# Altium PCB Battery_PSU.PcbDoc
Units mm, origin at the board's own origin, x right, y up, seen from the top; angles counter-clockwise.
Board outline 96.5 x 58 mm, 4 copper layers (Top Layer, Layer 1, Layer 2, Bottom Layer), stack 0.58 mm thick; 159 components, 93 nets, 531 pads, 10 vias.
Unrouted connection lines stored in the file: 406.
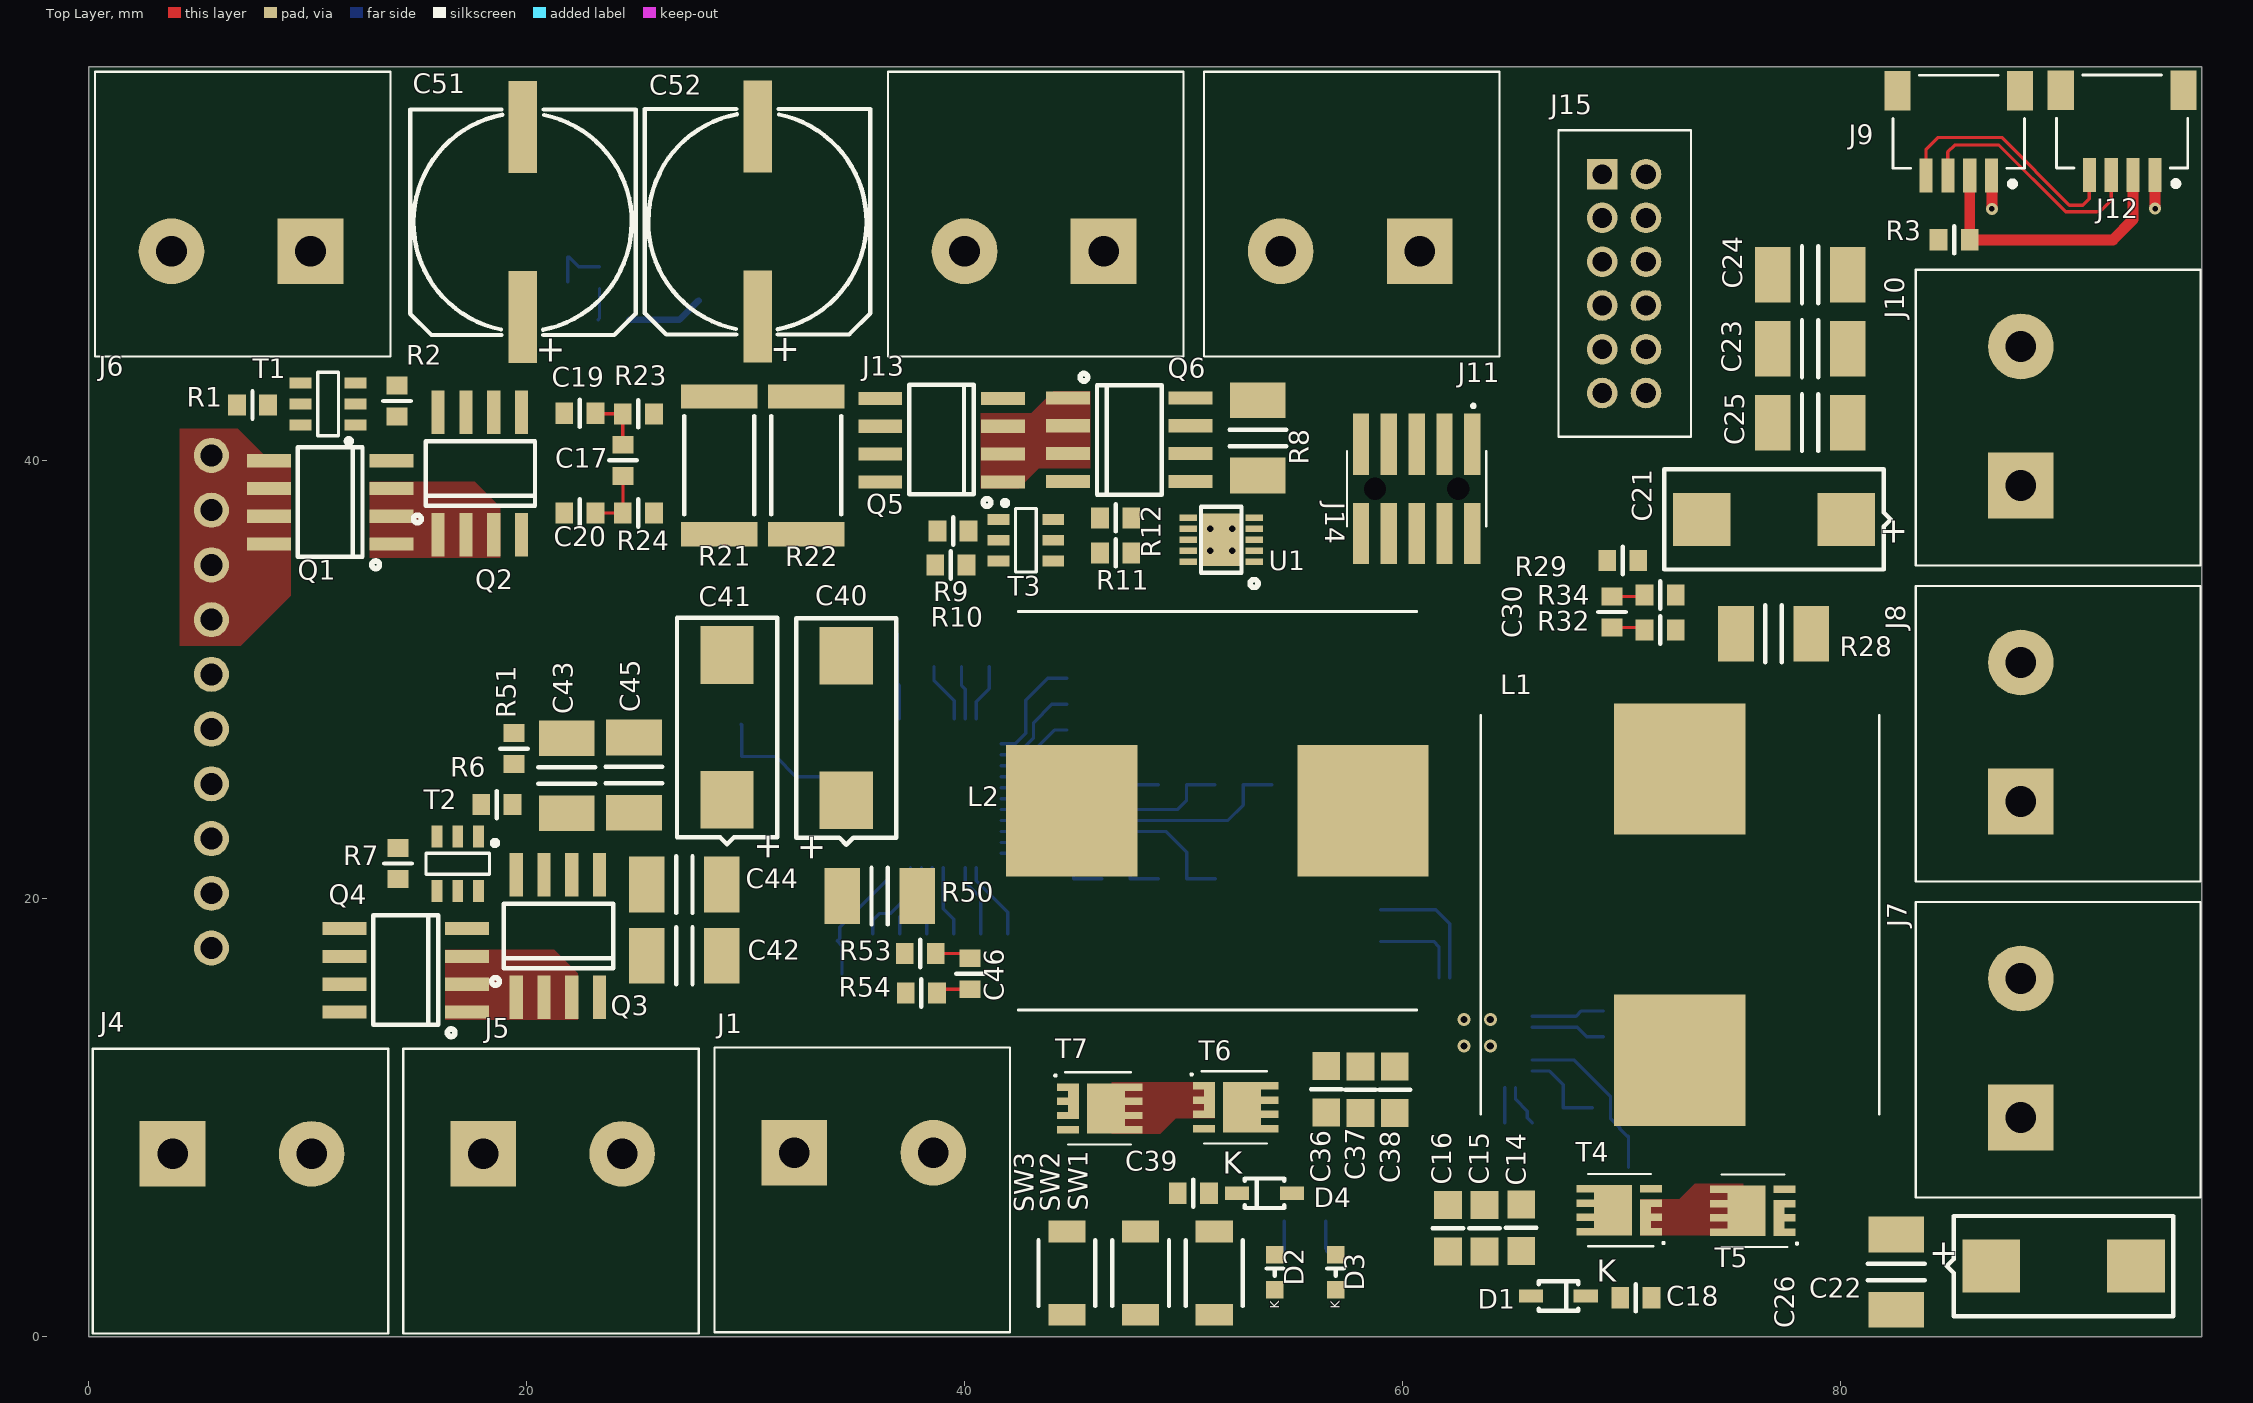
[diagram p0: Top Layer view]
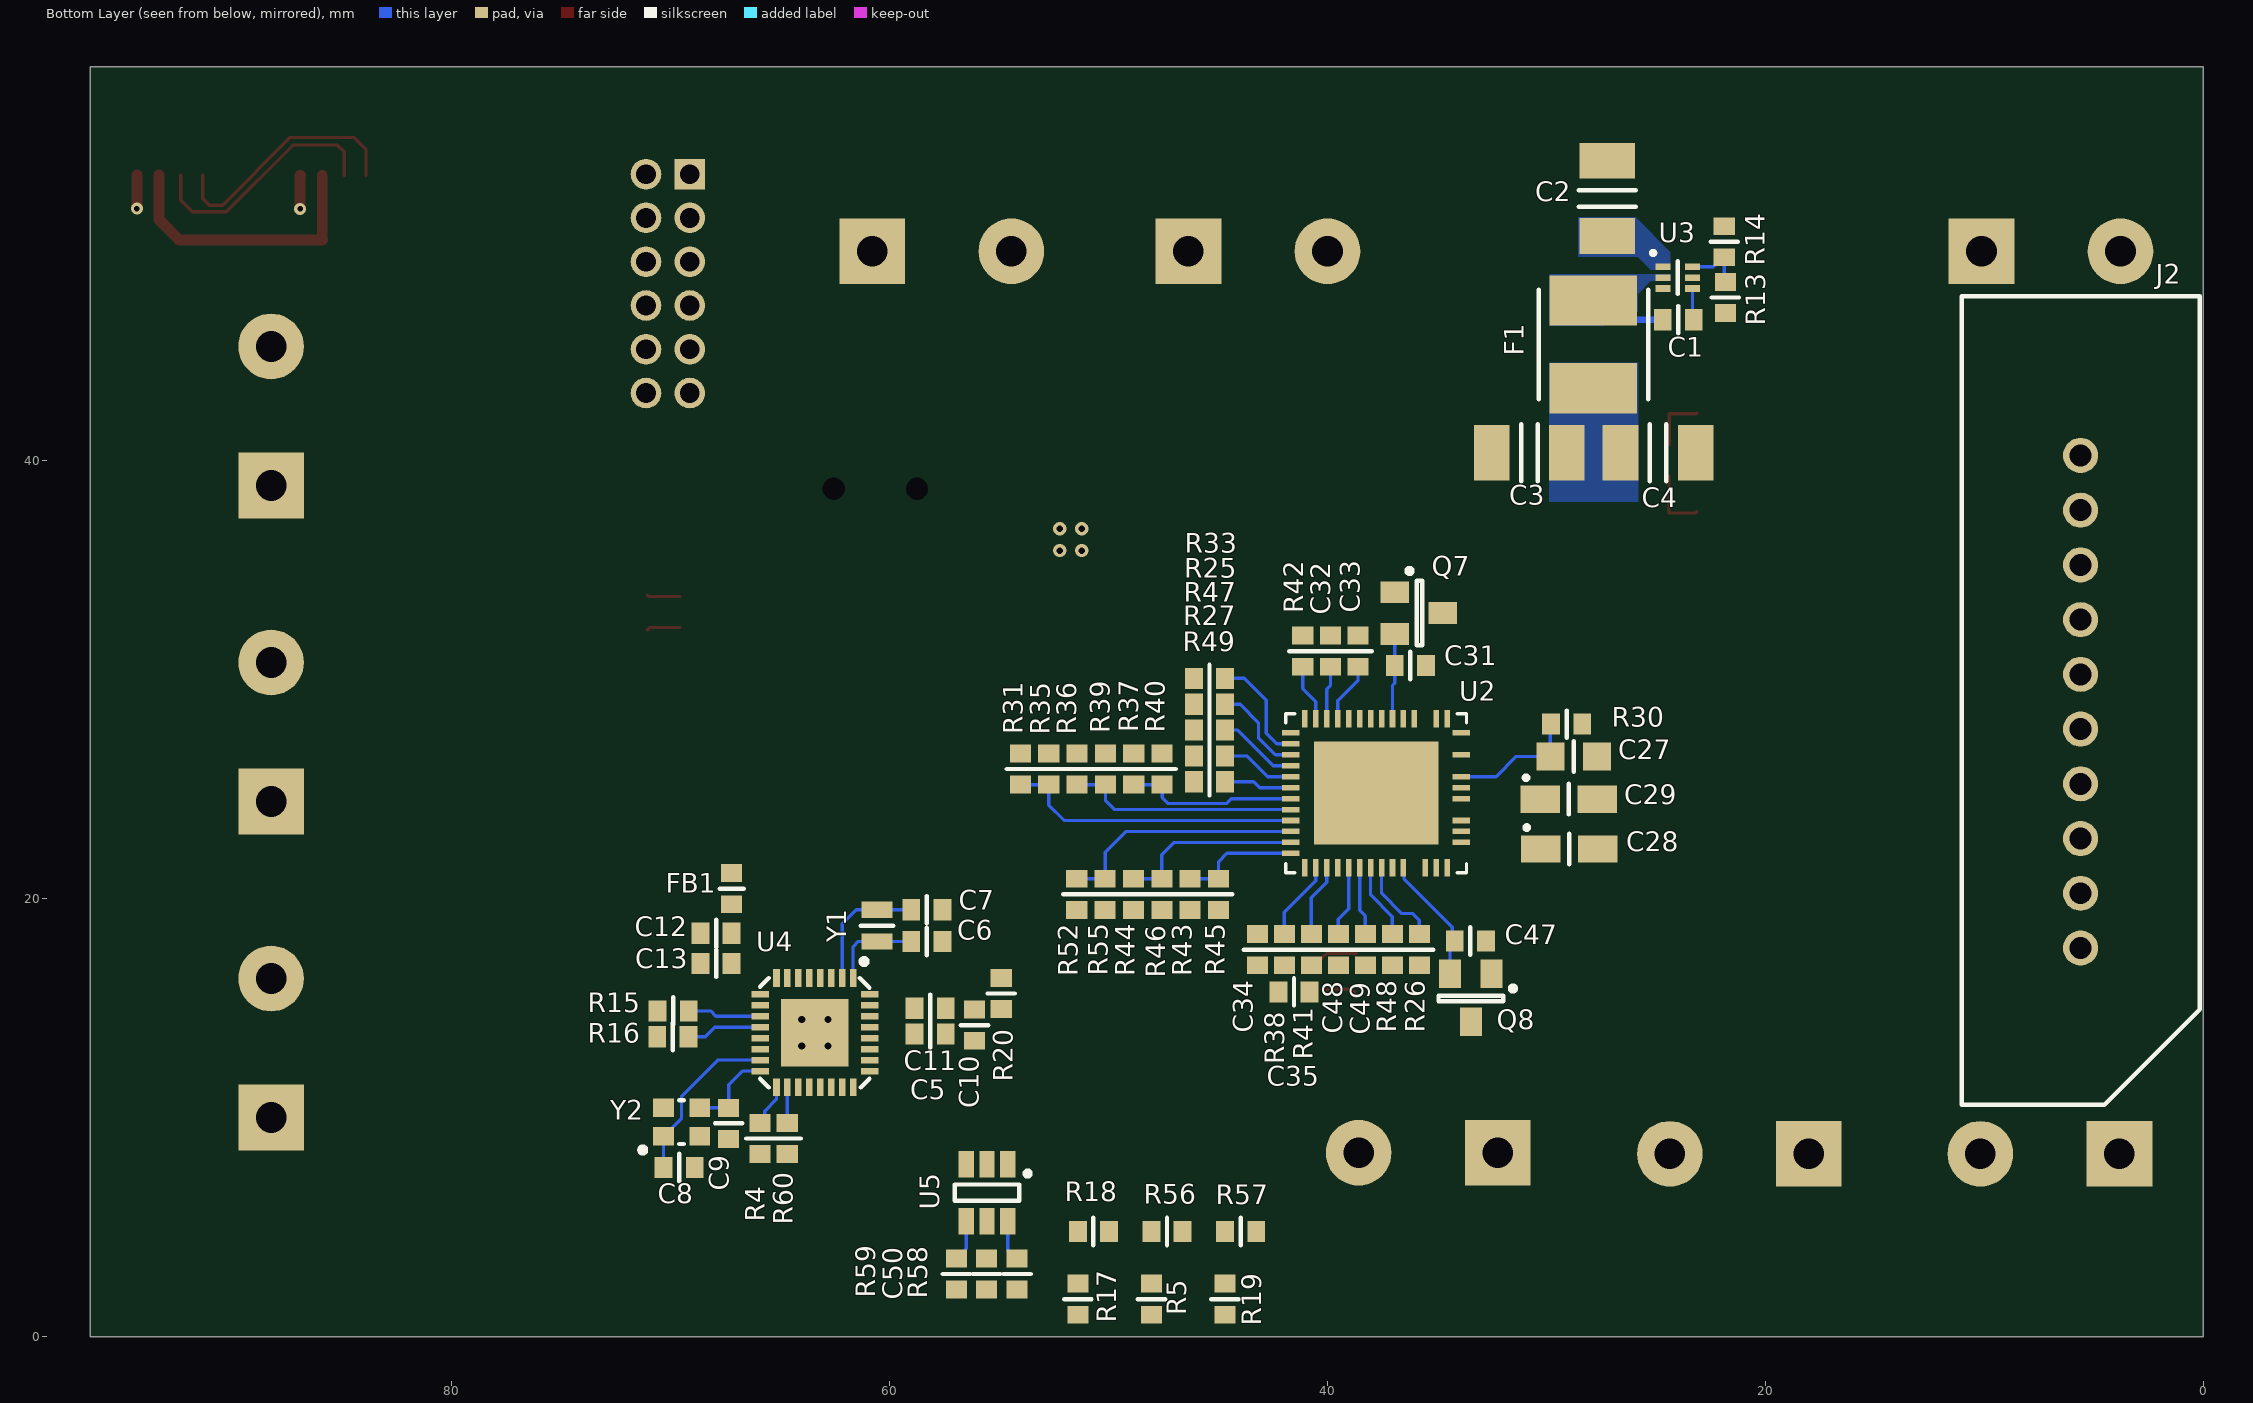
[diagram p1: Bottom Layer view, seen from below]
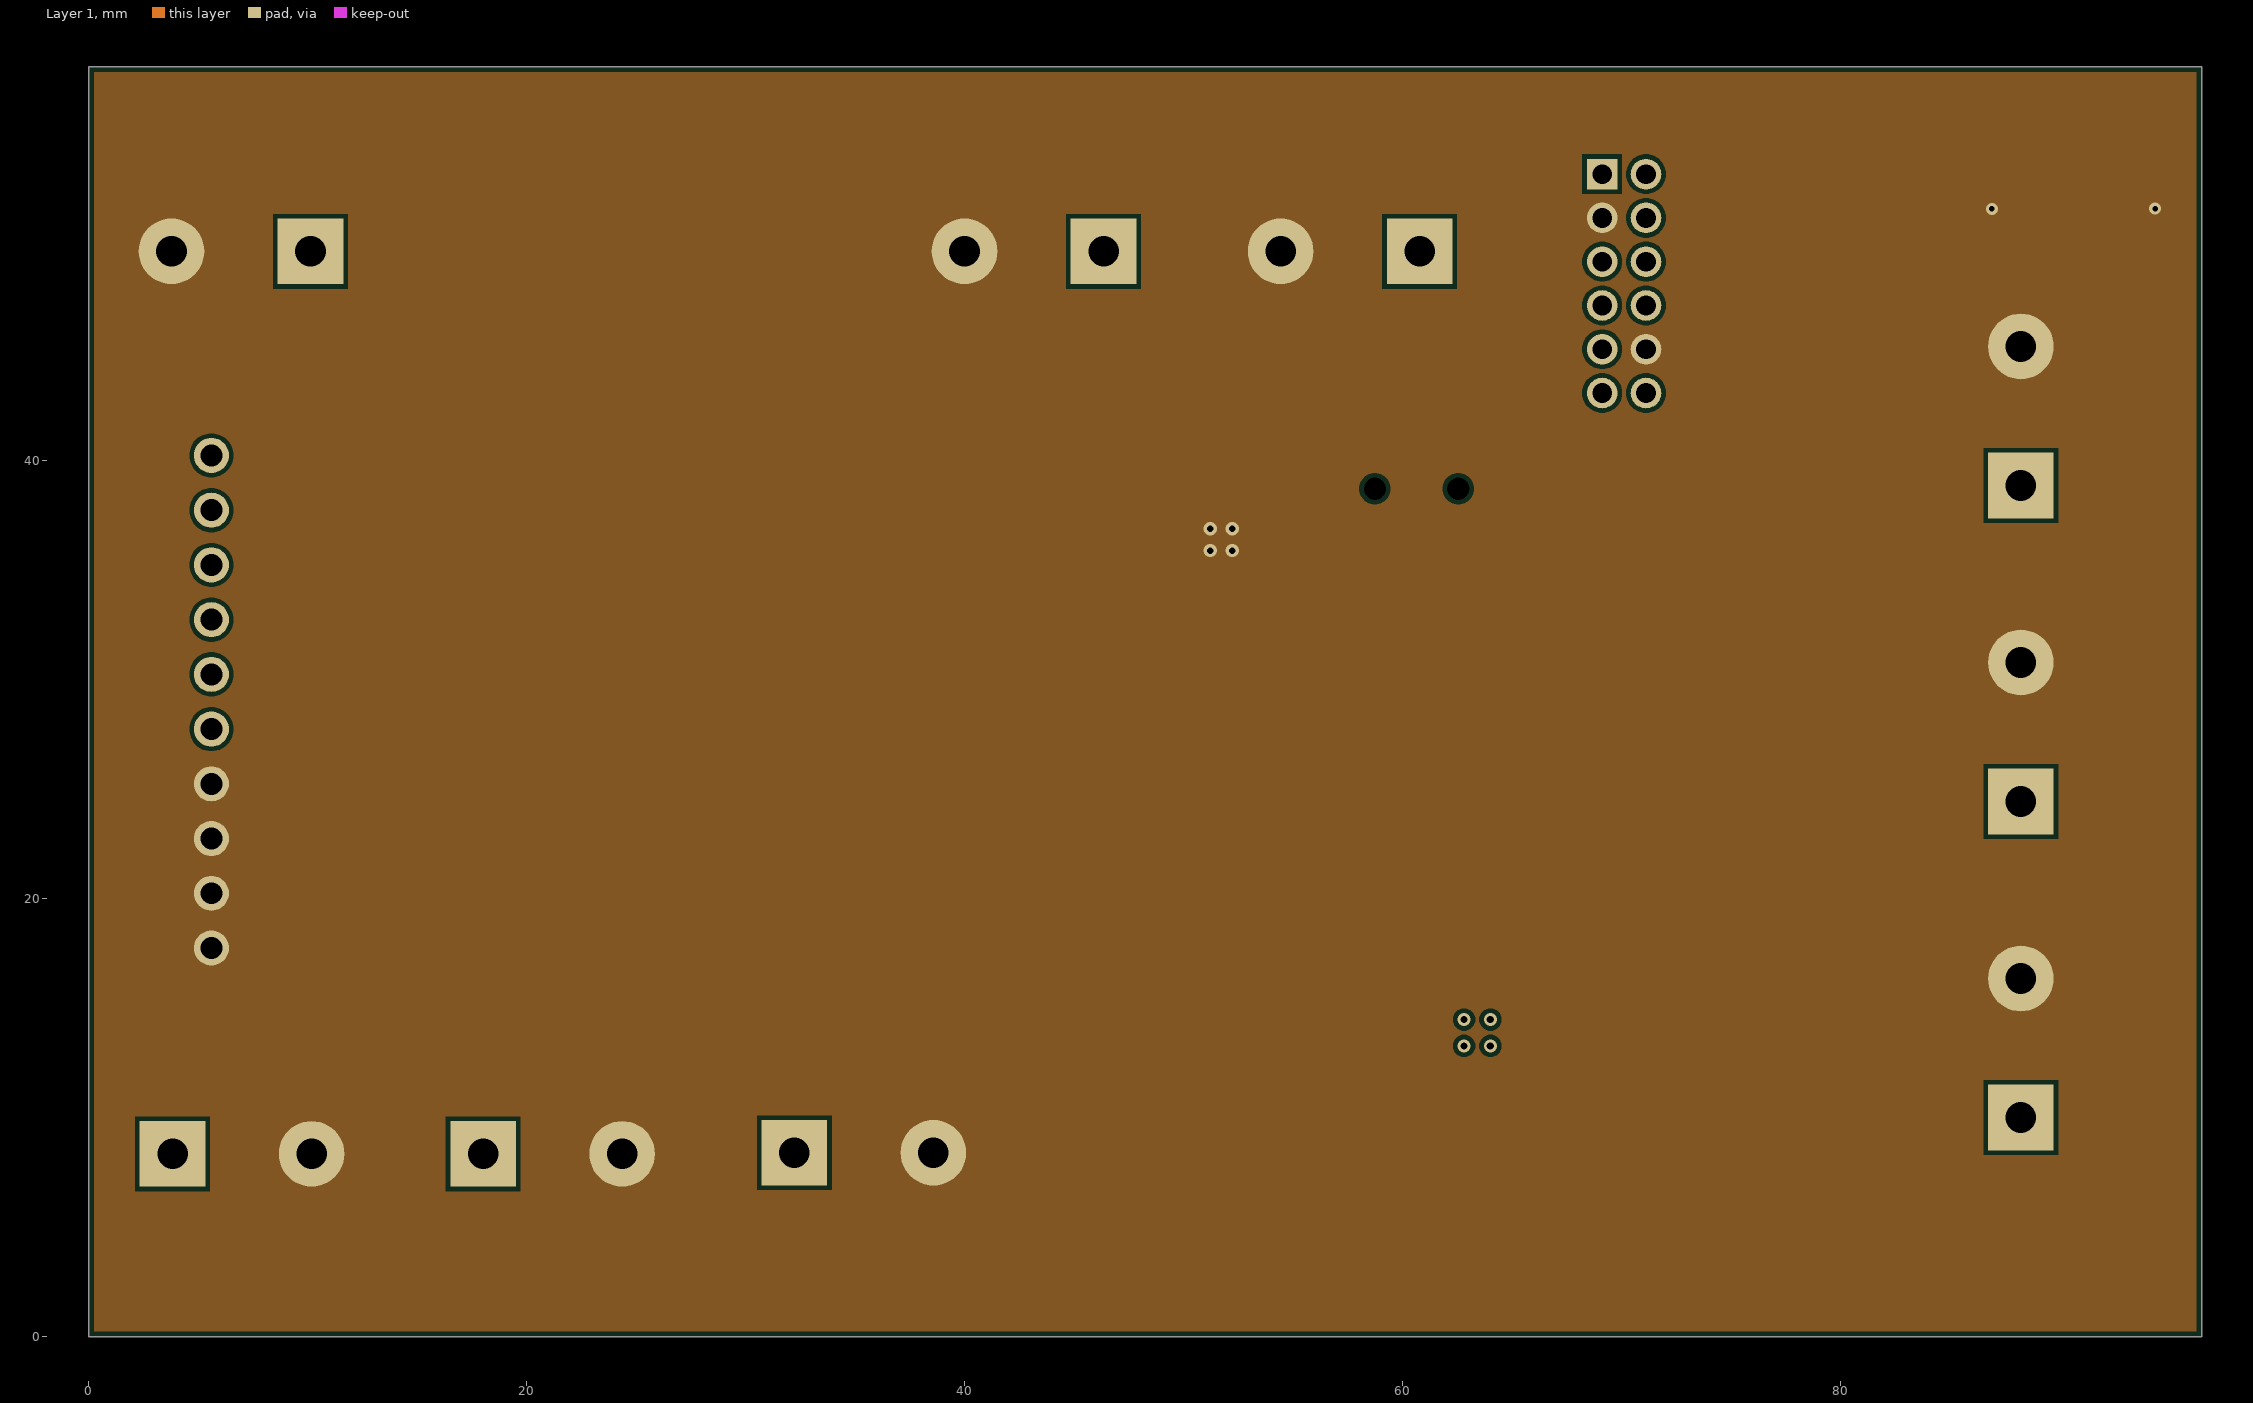
[diagram p2: Layer 1]

## Layer stack, top to bottom
Top Solder: solder mask 0.0254, SM-001, Dk 4
Top Layer: signal copper 0.035
Dielectric 6: prepreg 0.12, PR2116, Dk 4.13
Layer 1: signal copper 0.035
Dielectric 1: core 0.2, FR4, Dk 4.35
Layer 2: signal copper 0.035
Dielectric 7: prepreg 0.12, PR2116, Dk 4.13
Bottom Layer: signal copper 0.035
Bottom Solder: solder mask 0.0254, SM-001, Dk 4

## Board outline
0,0 96.5,0 96.5,58 0,58

## Design rules (kind name [scope] priority, off if disabled: settings)
Clearance Clearance_PWR [InNetClass('POWER_CLASS')] p1: gap=0.2 ignorepadtopadclearanceinfootprint=TRUE except(0: Arc-Hole Track-Hole SMDPad-Hole THPad-Hole Via-Hole Fill-Hole Poly-Hole Region-Hole Text-Hole) // Power clearance
Clearance Clearance_Global [All] p2: gap=0.125 ignorepadtopadclearanceinfootprint=TRUE except(0: Arc-Hole Track-Hole SMDPad-Hole THPad-Hole Via-Hole Fill-Hole Poly-Hole Region-Hole Text-Hole) // Global clearance if previous conditions aren't met
DiffPairsRouting DiffPairsRouting_Global [All] p1: maxlimit=0.5 minlimit=0.5 mostfreqgap=0.5 toplayer_minwidth=0.5 toplayer_maxwidth=0.5 toplayer_prefwidth=0.5 midlayer3_minwidth=0.5 midlayer3_maxwidth=0.5 midlayer3_prefwidth=0.5 midlayer4_minwidth=0.5 midlayer4_maxwidth=0.5 midlayer4_prefwidth=0.5 bottomlayer_minwidth=0.5 bottomlayer_maxwidth=0.5 bottomlayer_prefwidth=0.5 maxuncoupledlength=12.7
HoleSize [All] p1: absolutevalues=TRUE maxlimit=4.5 minlimit=0.15 maxpercent=80.000 minpercent=20.000
HoleToHoleClearance [All] p1: gap=0.475 allowstackedmicrovias=TRUE
MaximumViaCount MaximumViaCount_ETH [InDifferentialPairClass('ETH_DIFF_CLASS')] p1: limit=2
MaximumViaCount MaximumViaCount_PCIe [InDifferentialPairClass('PCIE_DIFF_CLASS')] p2: limit=2
MinimumAnnularRing [All] p1: minimumring=0.124
MinimumSolderMaskSliver [All] p1: minsoldermaskwidth=0.1
PolygonConnect [All] p1: connectstyle=Direct reliefconductorwidth=0.254 reliefentries=4 polygonreliefangle="90 Angle" airgapwidth=0.254
RoutingVias "RoutingVias <= 0.45mm" [(ObjectKind = 'Via') and (HoleDiameter <= AsMM(0.45))] p1: holewidth=0.25 width=0.5 viastyle="Through Hole" minholewidth=0.15 minwidth=0.5 maxholewidth=0.45 maxwidth=0.8
RoutingVias "RoutingVias > 0.45mm" [(ObjectKind = 'Via') and (HoleDiameter > AsMM(0.45))] p2: holewidth=0.5 width=0.85 viastyle="Through Hole" minholewidth=0.5 minwidth=0.85 maxholewidth=0.9 maxwidth=1.25
SilkToSilkClearance [All] p1: silktosilkclearance=0.1
SilkToSolderMaskClearance [IsPad] p1: minsilkscreentomaskgap=0.1 clearancetoexposedcopper=TRUE
SolderMaskExpansion [All] p1: expansion=0.05 istentingtop=FALSE
UnRoutedNet [All] p1: checkbadconnections=TRUE
Width Width_Power [InNetClass('POWER_CLASS')] p1: maxlimit=3 minlimit=0.3 preferedwidth=0.3 // Width for power signals
Width Width_Global [All] p2: maxlimit=0.3 minlimit=0.125 preferedwidth=0.15 // Global Width if the previous conditions aren't met
23 further rules are at their usual default settings.

## Classes and differential pairs
net class POWER_CLASS: +3V3_ANA_UC +3V3_UC +5V +5V_P +12V +VBAT +VP GND NetC1_2 NetC14_1 NetJ9_2 NetJ11_1 NetL1_1 NetL1_2 NetL2_1 NetL2_2 NetQ1_1 NetQ3_1 NetQ5_1 NetQ6_5
component class "PSU Unit": C14 C15 C16 C17 C18 C19 C20 C21 C22 C23 C24 C25 C26 C27 C28 C29 C30 C31 C32 C33 C34 C35 C36 C37 C38 C39 C40 C41 C42 C43 C44 C45 C46 C47 C48 C49 C51 C52 D1 D4 J15 L1 L2 Q7 Q8 R21 R22 R23 R24 R25 R26 R27 R28 R29 R30 R31 R32 R33 R34 R35 R36 R37 R38 R39 R40 R41 R42 R43 R44 R45 R46 R47 R48 R49 R50 R51 R52 R53 R54 R55 T4 T5 T6 T7 U2
component class "PSU Manager": C1 C2 C3 C4 C5 C6 C7 C8 C9 C10 C11 C12 C13 C50 D2 D3 F1 FB1 J14 R4 R5 R13 R14 R15 R16 R17 R18 R19 R20 R56 R57 R58 R59 R60 SW1 SW2 SW3 U3 U4 U5 Y1 Y2
component class power: J1 J2 J4 J5 J6 J7 J8 J9 J10 J11 J12 J13 Q1 Q2 Q3 Q4 Q5 Q6 R1 R2 R3 R6 R7 R8 R9 R10 R11 R12 T1 T2 T3 U1

## Components (designator, comment, footprint, x,y, rotation, side; value= is the part's Value field where it differs from the comment)
C1 "100nF" SM/C_0603 23.975,46.45 r0 bottom
C2 "22uF" SM/C_1210 27.225,51.989 r90 bottom
C3 "22uF" SM/C_1210 30.775,40.375 r0 bottom
C4 "22uF" SM/C_1210 24.9,40.375 r180 bottom
C5 "1uF" SM/C_0603 58.15,13.825 r180 bottom
C6 "15pF" SM/C_0603 58.3,18.05 r180 bottom
C7 "15pF" SM/C_0603 58.3,19.5 r180 bottom
C8 "15pF" SM/C_0603 69.614,7.725 r180 bottom
C9 "15pF" SM/C_0603 67.35,9.739 r270 bottom
C10 "1uF" SM/C_0603 56.125,14.225 r270 bottom
C11 "100nF" SM/C_0603 58.15,15 r180 bottom
C12 "1uF" SM/C_0603 67.925,18.425 r0 bottom
C13 "100nF" SM/C_0603 67.925,17.05 r0 bottom
C14 "2.2uF" SM/C_0805 65.425,4.975 r270 top
C15 "2.2uF" SM/C_0805 63.75,4.95 r270 top
C16 "2.2uF" SM/C_0805 62.075,4.95 r270 top
C17 "1nF" SM/C_0603 24.4,40.025 r270 top
C18 "100nF" SM/C_0603 70.661,1.775 r0 top
C19 "1nF" SM/C_0603 22.425,42.175 r180 top
C20 "1nF" SM/C_0603 22.425,37.625 r180 top
C21 "150uF" SM/CT_7343_12_D 76.973,37.325 r180 top
C22 "150uF" SM/CT_7343_12_D 90.2,3.225 r0 top
C23 "22uF" SM/C_1210 78.625,45.125 r180 top
C24 "22uF" SM/C_1210 78.625,48.5 r180 top
C25 "22uF" SM/C_1210 78.625,41.75 r180 top
C26 "22uF" SM/C_1210 82.55,2.95 r270 top
C27 "1uF" SM/C_0805 28.75,26.5 r180 bottom
C28 "4.7uF" T_CAPMP3216X180N 28.95,22.275 r180 bottom
C29 "4.7uF" T_CAPMP3216X180N 28.975,24.55 r180 bottom
C30 "1nF" SM/C_0603 69.575,33.1 r90 top
C31 "10nF" SM/C_0603 36.214,30.65 r180 bottom
C32 "100pF" SM/C_0603 39.863,31.311 r90 bottom
C33 "4.7nF" SM/C_0603 38.6,31.311 r90 bottom
C34 "1uF" SM/C_0603 43.2,17.675 r270 bottom
C35 "1uF" SM/C_0603 41.525,15.75 r0 bottom
C36 "2.2uF" SM/C_0805 56.525,11.3 r90 top
C37 "2.2uF" SM/C_0805 58.087,11.275 r90 top
C38 "2.2uF" SM/C_0805 59.65,11.275 r90 top
C39 "100nF" SM/C_0603 50.45,6.55 r180 top
C40 "150uF" SM/CT_7343_12_D 34.6,27.8 r90 top
C41 "150uF" SM/CT_7343_12_D 29.15,27.827 r90 top
C42 "22uF" SM/C_1210 27.2,17.4 r180 top
C43 "22uF" SM/C_1210 21.825,25.625 r90 top
C44 "22uF" SM/C_1210 27.2,20.65 r180 top
C45 "22uF" SM/C_1210 24.9,25.65 r90 top
C46 "1nF" SM/C_0603 40.25,16.575 r270 top
C47 "10nF" SM/C_0603 33.475,18.075 r180 bottom
C48 "100pF" SM/C_0603 39.5,17.675 r270 bottom
C49 "4.7nF" SM/C_0603 38.267,17.675 r270 bottom
C50 "100nF" SM/C_0603 55.575,2.861 r270 bottom
C51 "56uF" "SM/C SIZE F12" 19.825,50.9 r180 top
C52 "56uF" "SM/C SIZE F12" 30.55,50.925 r180 top
D1 "B140WS-7" "SM/D_SOD323_A1C2 (SC-76)" 67.125,1.85 r0 top
D2 "Green" "WL-SMCW_0603 - Green" 54.175,2.95 r90 top
D3 "Green" "WL-SMCW_0603 - Green" 56.95,2.95 r90 top
D4 "B140WS-7" "SM/D_SOD323_A1C2 (SC-76)" 53.7,6.55 r180 top
F1 "2.2uH" "TDK_SELF-SERIE VLS5045" 27.85,45.325 r270 bottom
FB1 "220 Ohm @ 100MHz" SM/L_0603 67.214,20.461 r270 bottom
J1 "HEADER_2" "PHOENIX MKDS 5/2-6,35 - 1714955" 38.575,8.4 r0 top
J2 "CONN DJI 10POS" "DJI Battery Connector" 5.6,29.05 r90 bottom locked
J4 "HEADER_2" "PHOENIX MKDS 5/2-6,35 - 1714955" 10.175,8.35 r0 top
J5 "HEADER_2" "PHOENIX MKDS 5/2-6,35 - 1714955" 24.361,8.35 r0 top
J6 "CONN 2 MALE" "PHOENIX MKDS 5/2-6,35 - 1714955" 3.775,49.575 r180 top
J7 "HEADER_2" "PHOENIX MKDS 5/2-6,35 - 1714955" 88.25,16.357 r90 top
J8 "HEADER_2" "PHOENIX MKDS 5/2-6,35 - 1714955" 88.25,30.793 r90 top
J9 "QWIIC I2C" JST_SM04B-SRSS-TB(LF)(SN) 85.414,53.042 r180 top
J10 "HEADER_2" "PHOENIX MKDS 5/2-6,35 - 1714955" 88.25,45.229 r90 top
J11 "HEADER_2" "PHOENIX MKDS 5/2-6,35 - 1714955" 54.436,49.575 r180 top
J12 "QWIIC I2C" JST_SM04B-SRSS-TB(LF)(SN) 92.875,53.05 r180 top
J13 "HEADER_2" "PHOENIX MKDS 5/2-6,35 - 1714955" 40,49.575 r180 top
J14 "FTSH-105-01-L-DV-K-A-P" FTSH-105-XX-YYY-DV-K-A-P-TR 60.65,38.725 r180 top
J15 "98414-G06-12ULF" 98414G0612ULF 69.125,53.1 r270 top
L1 "6.8uH" WE-HCI_189023 72.675,19.275 r90 top
L2 "6.8uH" WE-HCI_189023 51.55,24.025 r180 top
Q1 "SI4435FDY" "SOIC-8 - N" 11.025,38.105 r90 top
Q2 "SI4435FDY" "SOIC-8 - N" 17.86,39.425 r0 top
Q3 "SI4435FDY" "SOIC-8 - N" 21.425,18.3 r0 top
Q4 "SI4435FDY" "SOIC-8 - N" 14.475,16.73 r90 top
Q5 "SI4435FDY" "SOIC-8 - N" 38.95,40.95 r90 top
Q6 "SI4435FDY" "SOIC-8 - N" 47.525,40.97 r270 top
Q7 "MMBT3906" SOT23 35.825,33.05 r270 bottom
Q8 "MMBT3906" SOT23 33.45,15.475 r0 bottom
R1 "10K" SM/R_0603 7.475,42.55 r0 top
R2 "10K" SM/R_0603 14.075,42.739 r90 top
R3 "DNP" SM/R_0603 85.2,50.1 r0 top
R4 "4K7" SM/R_0603 65.925,9.05 r90 bottom
R5 "10K" SM/R_0603 48.037,1.711 r90 bottom
R6 "10K" SM/R_0603 18.636,24.3 r180 top
R7 "10K" SM/R_0603 14.125,21.614 r90 top
R8 "3mR" SM/R_1210 53.4,41.05 r90 top
R9 "10K" SM/R_0603 39.475,36.8 r0 top
R10 "10K" SM/R_0603 39.375,35.25 r0 top
R11 "10K" SM/R_0603 46.9,35.8 r0 top
R12 "DNP" SM/R_0603 46.9,37.4 r180 top
R13 "31K6" SM/R_0603 21.825,47.464 r90 bottom
R14 "10K" SM/R_0603 21.875,50.011 r90 bottom
R15 "4K7" SM/R_0603 69.884,14.878 r180 bottom
R16 "4K7" SM/R_0603 69.9,13.7 r180 bottom
R17 "10K" SM/R_0603 51.4,1.711 r90 bottom
R18 "22R" SM/R_0603 50.689,4.8 r180 bottom
R19 "10K" SM/R_0603 44.675,1.711 r90 bottom
R20 "1K" SM/R_0603 54.9,15.675 r90 bottom
R21 "6mR" SM/R_2512 28.8,39.8 r270 top
R22 "6mR" SM/R_2512 32.775,39.8 r270 top
R23 "1K" SM/R_0603 25.1,42.15 r180 top
R24 "1K" SM/R_0603 25.1,37.625 r180 top
R25 "10K" SM/R_0603 45.386,28.887 r180 bottom
R26 "10K" SM/R_0603 35.8,17.675 r90 bottom
R27 "10K" SM/R_0603 45.386,26.525 r0 bottom
R28 "3mR" SM/R_1210 76.95,32.1 r0 top
R29 "0R" SM/R_0603 70.064,35.45 r0 top
R30 "2R" SM/R_0603 29.075,27.975 r0 bottom
R31 "10K" SM/R_0603 54.025,25.925 r90 bottom
R32 "100R" SM/R_0603 71.775,32.275 r0 top
R33 "10K" SM/R_0603 45.386,30.069 r0 bottom
R34 "100R" SM/R_0603 71.775,33.875 r0 top
R35 "23K2" SM/R_0603 52.73,25.925 r90 bottom
R36 "DNP" SM/R_0603 51.435,25.925 r90 bottom
R37 "DNP" SM/R_0603 48.845,25.925 r90 bottom
R38 "0R" SM/R_0603 41.967,17.675 r270 bottom
R39 "0R" SM/R_0603 50.14,25.925 r270 bottom
R40 "0R" SM/R_0603 47.55,25.925 r270 bottom
R41 "10K" SM/R_0603 40.733,17.675 r90 bottom
R42 "10K" SM/R_0603 41.125,31.311 r270 bottom
R43 "DNP" SM/R_0603 46.27,20.2 r270 bottom
R44 "20K" SM/R_0603 48.86,20.2 r90 bottom
R45 "0R" SM/R_0603 44.975,20.2 r90 bottom
R46 "15K" SM/R_0603 47.565,20.2 r270 bottom
R47 "10K" SM/R_0603 45.386,27.706 r180 bottom
R48 "10K" SM/R_0603 37.033,17.675 r90 bottom
R49 "10K" SM/R_0603 45.386,25.344 r0 bottom
R50 "3mR" SM/R_1210 36.125,20.125 r180 top
R51 "0R" SM/R_0603 19.425,26.861 r270 top
R52 "20K" SM/R_0603 51.45,20.2 r90 bottom
R53 "100R" SM/R_0603 37.975,17.5 r180 top
R54 "100R" SM/R_0603 38.025,15.7 r180 top
R55 "17K8" SM/R_0603 50.155,20.2 r270 bottom
R56 "22R" SM/R_0603 47.326,4.8 r180 bottom
R57 "22R" SM/R_0603 43.964,4.8 r180 bottom
R58 "100R" SM/R_0603 54.175,2.861 r90 bottom
R59 "100R" SM/R_0603 56.95,2.861 r90 bottom
R60 "4K7" SM/R_0603 64.675,9.05 r90 bottom
SW1 "SW_PUSHBUTTON" Omron_SWITCH_B3U-1000P 51.4,2.9 r90 top value=B3U-1000P
SW2 "SW_PUSHBUTTON" Omron_SWITCH_B3U-1000P 48.037,2.9 r90 top value=B3U-1000P
SW3 "SW_PUSHBUTTON" Omron_SWITCH_B3U-1000P 44.675,2.9 r90 top value=B3U-1000P
T1 "PMN230ENEAX" TSOP-6 10.925,42.6 r90 top
T2 "PMN230ENEAX" TSOP-6 16.85,21.6 r180 top
T3 "PMN230ENEAX" TSOP-6 42.8,36.375 r270 top
T4 "BSZ110N08NS5ATMA1" BSZ110N08NS5ATMA1 69.975,5.775 r0 top
T5 "BSZ110N08NS5ATMA1" BSZ110N08NS5ATMA1 76.075,5.75 r0 top
T6 "BSZ110N08NS5ATMA1" BSZ110N08NS5ATMA1 52.32,10.475 r180 top
T7 "BSZ110N08NS5ATMA1" BSZ110N08NS5ATMA1 46.1,10.425 r180 top
U1 "PAC1710-1" WFDFN-10 51.725,36.4 r90 top
U2 "LTC3886EU" UKG_52_ADI 37.778,24.825 r270 bottom
U3 "AP62250Z6" SOT563-6 24,48.375 r180 bottom value=AP62250Z6-7
U4 "ATSAMD20E14A" "VFQFN-32_(32-Lead LFCSP_VQ)" 63.416,13.881 r270 bottom
U5 "SN74LVC2" SOT23-6 55.55,6.575 r0 bottom
Y1 "32.768 kHz" "ABRACON_CRYSTAL_ABS06 SERIES" 60.575,18.775 r90 bottom
Y2 "12MHz" "ABRACON_CRYSTAL_ABM10AIG SERIES" 69.5,9.8 r180 bottom

## Footprints (in the part's own frame and the unit in brackets; to place one, negate y for a bottom-side part, rotate by r counter-clockwise, add the part's x,y. Pads: shape width x height; smd on the part's side, far side on the other; paste and mask are expansions set on the pad)
98414G0612ULF [mm]
  rect 1.4x1.4 hole 0.9: 1(0,0)
  round 1.4 hole 0.9: 2(0,2) 3(2,0) 4(2,2) 5(4,0) 6(4,2) 7(6,0) 8(6,2) 9(8,0) 10(8,2) 11(10,0) 12(10,2)
  silkscreen extent -2,-2 12,4.05, body extent -2,-2.05 12,4.05, height 5.85
"ABRACON_CRYSTAL_ABM10AIG SERIES" [mm] "32.768kHz SMD LOW PROFILE CRYSTAL Abracon Series ABM10AIG 2.5 x 2 x 0.55mm"
  rect 0.95x0.85 smd mask+0.102: 1(-0.825,-0.65) 2(0.825,-0.65) 3(0.825,0.65) 4(-0.825,0.65)
  silkscreen extent -1.9,-1.4 0.1,1, body extent -1.24,-1 1.24,1, height 0.51
"ABRACON_CRYSTAL_ABS06 SERIES" [mm] "32.768kHz SMD LOW PROFILE CRYSTAL Abracon Series ABS06 2 x 1.2 x 0.6mm"
  rect 0.75x1.4 smd: 1(-0.725,0) 2(0.725,0)
  silkscreen extent 0,-0.75 0,0.75, body extent -1,-0.6 1,0.6, height 0.61
BSZ110N08NS5ATMA1 [mm]
  rect 0.5x0.34 smd: 1(1.625,-0.975) 2(1.625,-0.325) 3(1.625,0.325)
  rect 1x0.34 smd: 4(1.375,0.975)
  rect 0.8x0.34 smd: 5(-1.625,0.975) 6(-1.625,0.325) 7(-1.625,-0.325) 8(-1.625,-0.975)
  rect 1.74x2.29 smd: 9(-0.355,0)
  rect 0.5x1.64 smd: 10(1.125,-0.325)
  silkscreen extent -1.5,-1.65 2,1.65, body extent -1.99,-1.65 1.84,1.65, height 1.2
"DJI Battery Connector" [mm]
  round 1.6 hole 1 mask+0.1: 1(-11.3,0) 2(-8.8,0) 3(-6.3,0) 4(-3.8,0) 5(-1.3,0) 6(1.2,0) 7(3.7,0) 8(6.2,0) 9(8.7,0) 10(11.2,0)
  silkscreen extent -18.47,-5.45 18.48,5.43
FTSH-105-XX-YYY-DV-K-A-P-TR [mm]
  rect 0.74x2.79 smd: 1(-2.54,-2.035) 2(-2.54,2.035) 3(-1.27,-2.035) 4(-1.27,2.035) 5(0,-2.035) 6(0,2.035) 7(1.27,-2.035) 8(1.27,2.035) 9(2.54,-2.035) 10(2.54,2.035)
  round 0.51 hole 1.02 unplated: 11(-1.905,0) 12(1.905,0)
  silkscreen extent -3.18,-3.83 3.18,1.72, body extent -3.18,-2.92 3.18,4.45, height 6.98
JST_SM04B-SRSS-TB(LF)(SN) [mm]
  rect 0.6x1.55 smd: 1(-1.5,0) 2(-0.5,0) 3(0.5,0) 4(1.5,0)
  rect 1.2x1.8 smd: S1(-2.8,-3.875) S2(2.8,-3.875)
  silkscreen extent -3,-4.57 3,0.48
Omron_SWITCH_B3U-1000P [mm] "Ultra-small Tactile Switch - Omron"
  rect 1x1.7 smd: 1(-1.9,0) 2(1.9,0)
  silkscreen extent -1.5,-1.3 1.5,1.3, body extent -2,-1.26 2,1.24, height 1.6
"PHOENIX MKDS 5/2-6,35 - 1714955" [mm]
  rect 3x3 hole 1.4: 1(-6.35,0)
  round 3 hole 1.4: 2(0,0)
  silkscreen extent -10,-8.2 3.5,4.8, body extent -10.11,-7.9 3.16,4.6, height 21.5
"SM/C SIZE F12" [mm] "Aluminium Electrolytic capacitor - serie F12 Sanyo"
  rect 1.3x4.2 smd: 1(0,4.32) 2(0,-4.35)
  silkscreen extent -5.15,-5.15 5.15,5.15, body extent -5.15,-5.45 5.15,5.45, height 13.8
SM/C_0603 [mil]
  rect 32x38 smd: 1(-28,0) 2(28,0)
  silkscreen extent 0,-25 0,25, body extent -31,-16 31,16, height 31
SM/C_0805 [mil]
  rect 50x50 smd: 1(-42,0) 2(42,0)
  silkscreen extent 0,-28 0,28, body extent -39,-24 39,24, height 47
SM/C_1210 [mil]
  rect 64x100 smd: 1(-67.5,0) 2(67.5,0)
  silkscreen extent -15,-51 15,51, body extent -63,-49 63,49
SM/CT_7343_12_D [mil]
  rect 104x96 smd: 1(-130,0) 2(130,0)
  silkscreen extent -210,-90 198,90, body extent -144,-85 144,85, height 111
"SM/D_SOD323_A1C2 (SC-76)" [mm] "SOD-323; 2 Leads; Body 1.8x 1.4 mm, (LxW)"
  rect 1.1x0.599 smd: 1(-1.25,0) 2(1.25,0)
  silkscreen extent -0.9,-0.67 0.9,0.67, body extent -1.35,-0.67 1.35,0.68, height 0.79
SM/L_0603 [mil]
  rect 32x38 smd: 1(-28,0) 2(28,0)
  silkscreen extent 0,-22 0,22, body extent -31,-19 31,19, height 30
SM/R_0603 [mil]
  rect 32x38 smd: 1(-28,0) 2(28,0)
  silkscreen extent 0,-25 0,25, body extent -31,-16 32,16, height 21
SM/R_1210 [mil]
  rect 64x100 smd: 1(-67.5,0) 2(67.5,0)
  silkscreen extent -15,-51 15,51, body extent -63,-51 63,51, height 25
SM/R_2512 [mm] "Chip Resistor 2512(6332), Body 6.3x3.2mm, IPC Medium Density"
  rect 1.1x3.5 smd: 1(-3.15,0) 2(3.15,0)
  silkscreen extent -2.25,-1.6 2.25,1.6, body extent -3.16,-1.6 3.16,1.6, height 0.62
"SOIC-8 - N" [mm] "SOIC-8 / Body 5x4x1.75mm / Pitch 1.27mm  / 8 Pins"
  rect 0.6x2 smd: 1(-1.905,-2.8) 2(-0.635,-2.8) 3(0.635,-2.8) 4(1.905,-2.8) 5(1.905,2.8) 6(0.635,2.8) 7(-0.635,2.8) 8(-1.905,2.8)
  silkscreen extent -3.02,-2.25 2.52,1.48, body extent -2.45,-3 2.45,3, height 1.7
SOT23 [mm] "IC Package SOT23- Body 2.9x1.3x0.95mm"
  rect 1x1.3 smd: 1(-0.95,-1.1) 2(0.95,-1.1) 3(0,1.1)
  silkscreen extent -2.03,-0.53 1.48,0.15, body extent -1.46,-1.17 1.46,1.17, height 1
SOT23-6 [mm] "IC Package SOT23-6- Body 2.9x1.6x1.45mm"
  rect 0.7x1.2 smd: 1(-0.95,-1.3) 2(0,-1.3) 3(0.95,-1.3) 4(0.95,1.3) 5(0,1.3) 6(-0.95,1.3)
  silkscreen extent -1.96,-0.98 1.48,0.38, body extent -1.5,-1.5 1.5,1.5, height 1.3
SOT563-6 [mm] "IC Package SOT553-6 - Body 1.6x1.2x0.6mm"
  rect 0.67x0.3 smd: 1(-0.675,0.5) 2(-0.675,0) 3(-0.675,-0.5) 4(0.675,-0.5) 5(0.675,0) 6(0.675,0.5)
  silkscreen extent -1.22,-0.75 0,1.22, body extent -0.8,-0.8 0.8,0.8, height 0.6
T_CAPMP3216X180N [mm]
  rect 1.8x1.25 smd: 1(-1.3,0) 2(1.3,0)
  silkscreen extent -2,-0.7 0,1.02, body extent -1.6,-0.8 1.6,0.8, height 1.6
"TDK_SELF-SERIE VLS5045" [mm]
  rect 2.3x4 smd: 1(-2,0) 2(2,0)
  silkscreen extent -2.5,-2.5 2.5,2.5, body extent -2.5,-2.5 2.5,2.5, height 4.5
TSOP-6 [mm] "IC Package SC70-6 (SOT363) - Body 2x1.25x1.1mm"
  rect 0.5x1 smd: 1(-0.95,-1.25) 2(0,-1.25) 3(0.95,-1.25) 4(0.95,1.25) 5(0,1.25) 6(-0.95,1.25)
  silkscreen extent -1.81,-1.06 1.45,0.48, body extent -1.5,-1.35 1.5,1.35, height 1
UKG_52_ADI [mm]
  rect 0.808x0.255 smd paste+0 mask+0: 1(-3.401,3.25) 2(-3.401,2.75) 4(-3.401,1.75) 5(-3.401,1.25) 6(-3.401,0.75) 7(-3.401,0.25) 8(-3.401,-0.25) 9(-3.401,-0.75) 10(-3.401,-1.25) 11(-3.401,-1.75) 12(-3.401,-2.25) 13(-3.401,-2.75) 14(-3.401,-3.25) 27(3.401,-3.25) 28(3.401,-2.75) 29(3.401,-2.25) 30(3.401,-1.75) 31(3.401,-1.25) 32(3.401,-0.75) 33(3.401,-0.25) 34(3.401,0.25) 35(3.401,0.75) 36(3.401,1.25) 38(3.401,2.25) 39(3.401,2.75) 40(3.401,3.25)
  rect 0.255x0.808 smd paste+0 mask+0: 15(-2.75,-3.896) 16(-2.25,-3.896) 17(-1.75,-3.896) 18(-1.25,-3.896) 19(-0.75,-3.896) 20(-0.25,-3.896) 21(0.25,-3.896) 22(0.75,-3.896) 23(1.25,-3.896) 24(1.75,-3.896) 25(2.25,-3.896) 26(2.75,-3.896) 42(2.25,3.896) 43(1.75,3.896) 44(1.25,3.896) 46(0.25,3.896) 47(-0.25,3.896) 48(-0.75,3.896) 50(-1.75,3.896) 52(-2.75,3.896)
  rect 4.699x5.69 smd paste-2.832 mask+0: 53(0,0)
  silkscreen extent -3.63,-4.13 3.63,4.13, body extent -3.5,-4 3.51,4, height 0.81
"VFQFN-32_(32-Lead LFCSP_VQ)" [mm] "IC Package VQFQFN-32 (32-Lead LFCSP_VQ)"
  rect 0.8x0.3 smd mask+0.1: 1(-2.5,1.75) 2(-2.5,1.25) 3(-2.5,0.75) 4(-2.5,0.25) 5(-2.5,-0.25) 6(-2.5,-0.75) 7(-2.5,-1.25) 8(-2.5,-1.75) 17(2.5,-1.75) 18(2.5,-1.25) 19(2.5,-0.75) 20(2.5,-0.25) 21(2.5,0.25) 22(2.5,0.75) 23(2.5,1.25) 24(2.5,1.75)
  rect 0.3x0.8 smd mask+0.1: 9(-1.75,-2.5) 10(-1.25,-2.5) 11(-0.75,-2.5) 12(-0.25,-2.5) 13(0.25,-2.5) 14(0.75,-2.5) 15(1.25,-2.5) 16(1.75,-2.5) 25(1.75,2.5) 26(1.25,2.5) 27(0.75,2.5) 28(0.25,2.5) 29(-0.25,2.5) 30(-0.75,2.5) 31(-1.25,2.5) 32(-1.75,2.5)
  rect 3.1x3.1 smd paste-2 mask+0.1: 33(0,0)
  silkscreen extent -3.37,-2.5 2.5,2.5, body extent -2.5,-2.5 2.5,2.5, height 1.01
WE-HCI_189023 [mm]
  rect 6x6 smd: 1(-6.65,0) 2(6.65,0)
  silkscreen extent -9.1,-9.1 9.1,9.1
WFDFN-10 [mm]
  rect 0.3x0.8 smd: 1(-1,-1.5) 2(-0.5,-1.5) 3(0,-1.5) 4(0.5,-1.5) 5(1,-1.5) 6(1,1.5) 7(0.5,1.5) 8(0,1.5) 9(-0.5,1.5) 10(-1,1.5)
  rect 2.4x1.7 smd: 11(0,0)
  silkscreen extent -2.18,-1.68 1.5,0.92, body extent -1.5,-1.55 1.5,1.5, height 0.8
"WL-SMCW_0603 - Green" [mm] "SMD Mono-color Chip LED, body 1.6x0.8mm"
  rect 0.8x0.8 smd: 1(-0.8,0) 2(0.8,0)
  silkscreen extent -0.17,-0.38 0.16,0.38, body extent -0.8,-0.4 0.8,0.4, height 0.7

## Part data
C1 C11 C13 C50: library part "CAP CER 0.1UF 16V X7R 0603", "CAP CER 0.1UF 16V X7R 0603", Dielectric=X7R, Manufacturer=Samsung, Manufacturer P/N=CL10B104KO8WPNC, Supplier Part Number 1=1276-6582-1-ND, Tolerance=10%, Voltage=16V, ComponentLink1Description=Supplier, ComponentLink1URL=https://www.digikey.ch/products/fr?keywords=1276-6582-1-ND, ComponentLink2Description=Datasheet, ComponentLink2URL=https://www.mouser.ch/datasheet/2/585/MLCC_Automotive-1837966.pdf, Supplier 1=Digikey, Supplier 2=Mouser, Supplier Part Number 2=187-CL10B104KO8WPNC
C2 C3 C4 C23 C24 C25 C26 C42 C43 C44 C45: library part "CAP CER 22UF 25V X5R 1210", "CAP CER 22UF 25V X5R 1210", Dielectric=X5R, Manufacturer=Samsung, Manufacturer P/N=CL32A226KAJNNWE, Supplier Part Number 1=1276-3369-1-ND, Tolerance=10%, Voltage=25V, ComponentLink1Description=Supplier, ComponentLink1URL=https://www.digikey.ch/product-detail/fr/samsung-electro-mechanics/CL32A226KAJNNWE/1276-3369-1-ND/3891455, ComponentLink2Description=Datasheet, ComponentLink2URL=https://www.mouser.ch/datasheet/2/585/MLCC-1837944.pdf, Supplier 1=Digikey, Supplier 2=Mouser, Supplier Part Number 2=187-CL32A226KAJNNWE
C5 C10 C12 C34 C35: library part "CAP CER 1UF 10V X7R 0603", "CAP CER 1UF 10V X7R 0603", Dielectric=X7R, Manufacturer=Samsung, Manufacturer P/N=CL10B105KP8NNNC, Supplier Part Number 1=1276-1946-1-ND, Tolerance=10%, Voltage=10V, Supplier 1=Digikey, Supplier 2=Mouser, Supplier Part Number 2=187-CL10B105KP8NNNC
C6 C7 C8 C9: library part "CAP CER 15PF 50V C0G/NP0 0603", "CAP CER 15PF 50V C0G/NP0 0603", Dielectric=C0G/NP0, Manufacturer=AVX, Manufacturer P/N=06035A150JAT2A, Supplier Part Number 1=478-1165-1-ND, Tolerance=5%, Voltage=50V, ComponentLink1Description=Supplier, ComponentLink1URL=https://www.digikey.ch/product-detail/fr/samsung-electro-mechanics/CL10A475KQ8NNWC/1276-1902-1-ND/3889988, ComponentLink2Description=Datasheet, ComponentLink2URL=https://www.mouser.ch/datasheet/2/585/MLCC-1837944.pdf, Supplier 1=Digikey, Supplier 2=Mouser, Supplier Part Number 2=581-06035A150J
C14 C15 C16 C36 C37 C38: library part "CAP CER 2.2UF 25V X5R 0805", "CAP CER 2.2UF 25V X5R 0805", Dielectric=X5R, Manufacturer=Samsung, Manufacturer P/N=CL21A225KAFNNNE, Supplier Part Number 1=1276-1763-1-ND, Tolerance=10%, Voltage=25V, Supplier 1=Digikey, Supplier 2=Mouser, Supplier Part Number 2=187-CL21A225KAFNNNE
C17 C19 C20 C30 C46: library part "CAP CER 1NF 50V X7R 0603", "CAP CER 1NF 50V X7R 0603", Dielectric=X7R, Manufacturer=Samsung, Manufacturer P/N=CL10B102KB8WPJC, Supplier Part Number 1=1276-CL10B102KB8WPJCCT-ND, Tolerance=10%, Voltage=50V, ComponentLink1Description=Supplier, ComponentLink1URL=https://www.digikey.ch/product-detail/fr/samsung-electro-mechanics/CL10B102KB8WPJC/1276-CL10B102KB8WPJCCT-ND/11487951, ComponentLink2Description=Datasheet, ComponentLink2URL=https://www.mouser.ch/datasheet/2/585/MLCC_Automotive-1837966.pdf, Supplier 1=Digikey, Supplier 2=Mouser, Supplier Part Number 2=187-CL10B102KB8WPJC
C18 C39: library part "CAP CER 0.1UF 50V X7R 0603", "CAP CER 0.1UF 50V X7R 0603", Dielectric=X7R, Manufacturer=Samsung, Manufacturer P/N=CL10B104KB8NNNL, Supplier Part Number 1=1276-CL10B104KB8NNNLCT-ND, Tolerance=10%, Voltage=50V, Supplier 1=Digikey, Supplier 2=Mouser, Supplier Part Number 2=187-CL10B104KB8NNNL
C21 C22 C40 C41: library part "CAP TANT 150UF 20% 25V 2924", "CAP TANT 150UF 20% 25V 2924", Manufacturer=AVX, Manufacturer P/N=TAJV157M025RNJ, Rating=25V, Supplier Part Number 1=478-13134-1-ND, Tolerance=20%, Supplier 1=Digikey, Supplier 2=Mouser, Supplier Part Number 2=581-TAJV157M025RNJ, Type=TA
C27: library part "CAP CER 1UF 25V X7R 0805", "CAP CER 1UF 25V X7R 0805", Dielectric=X7R, Manufacturer=Yageo, Manufacturer P/N=CC0805KKX7R8BB105, Supplier Part Number 1=311-1456-1-ND, Tolerance=10%, Voltage=25V, Supplier 1=Digikey, Supplier 2=Mouser, Supplier Part Number 2=603-CC805KKX7R8BB105
C28 C29: library part C-TA-4.7uF-10V-20%-3216, "Capacitor TA 4.7uF 10V 20% 3216", Manufacturer=Kemet, Manufacturer P/N=T491A475M010AT, Rating=10V, Supplier Part Number 1=399-3698-1-ND, Tolerance=20%, Supplier 1=Digikey, Supplier 2=Mouser, Supplier Part Number 2=80-T491A475M010, Type=TA
C31 C47: library part "CAP CER 10NF 50V X7R 0603", "CAP CER 10NF 50V X7R 0603", Dielectric=X7R, Manufacturer=Samsung, Manufacturer P/N=CL10B103KB8WPJC, Supplier Part Number 1=1276-CL10B103KB8WPJCCT-ND, Tolerance=10%, Voltage=50V, Supplier 1=Digikey, Supplier 2=Mouser, Supplier Part Number 2=187-CL10B103KB8WPJC
C32 C48: library part "CAP CER 100PF 50V C0G/NP0 0603", "CAP CER 100PF 50V C0G/NP0 0603", Dielectric=C0G/NP0, Manufacturer=Samsung, Manufacturer P/N=CL10C101JB8NNNC, Supplier Part Number 1=1276-1008-1-ND, Tolerance=5%, Voltage=50V, Supplier 1=Digikey, Supplier 2=Mouser, Supplier Part Number 2=187-CL10C101JB8NNNC
C33 C49: library part "CAP CER 4700PF 50V X7R 0603", "CAP CER 4700PF 50V X7R 0603", Dielectric=X7R, Manufacturer=Kemet, Manufacturer P/N=C0603C472K5RAC7411, Supplier Part Number 1=399-C0603C472K5RAC7411CT-ND, Tolerance=10%, Voltage=50V, Supplier 1=Digikey, Supplier 2=Mouser, Supplier Part Number 2=80-C0603C472K5RLR
C51 C52: library part "HYBRID POLYMER, SMD, 63V, 56UF,", "HYBRID POLYMER, SMD, 63V, 56UF,", Manufacturer=Kemet, Manufacturer P/N=A780MS566M1JLAS030, Rating=63V, Supplier Part Number 1=399-A780MS566M1JLAS030CT-ND, Tolerance=20%, ComponentLink1Description=Supplier, ComponentLink1URL=https://www.digikey.ch/product-detail/fr/kemet/A780MS566M1JLAS030/399-A780MS566M1JLAS030CT-ND/13404741, ComponentLink2Description=Datasheet, ComponentLink2URL=https://content.kemet.com/datasheets/KEM_A4098_A780.pdf, Supplier 1=Digikey, Supplier 2=Mouser, Supplier Part Number 2=80-A780MS566M1JLAS30, Type=Hybride
D1 D4: library part "DIODE SCHOTTKY 40V 1A SOD323", "DIODE SCHOTTKY 40V 1A SOD323", Manufacturer="Diodes Incorporated", Supplier Part Number 1=B140WS-7DICT-ND, ComponentLink1Description=Supplier, ComponentLink1URL=https://www.digikey.fr/product-detail/fr/diodes-incorporated/B140WS-7/B140WS-7DICT-ND/5218269, ComponentLink2Description=Datasheet, ComponentLink2URL=https://www.diodes.com/assets/Datasheets/ds31543.pdf, Manufacturer P/N=B140WS-7, Supplier 1=Digikey, Supplier 2=Mouser, Supplier Part Number 2=621-B140WS-7
D2 D3: library part "LED GREEN CLEAR 0603 SMD", "LED GREEN CLEAR 0603 SMD", Manufacturer="Würth Elektronik", Manufacturer P/N=150060GS75000, Supplier Part Number 1=732-4971-1-ND, Supplier 1=Digikey, Supplier 2=Mouser, Supplier Part Number 2=710-150060GS75000
F1: library part "FIXED IND 2.2UH 4.7A 28.6MOHM SMD", "FIXED IND 2.2UH 4.7A 28.6MOHM SMD", Manufacturer=TDK, Manufacturer P/N=VLS5045EX-2R2N, Supplier Part Number 1=445-174850-1-ND, ComponentLink1Description=Supplier, ComponentLink1URL=https://www.digikey.ch/product-detail/fr/tdk-corporation/VLS5045EX-2R2N/445-174850-1-ND/6560407, ComponentLink2Description=Datasheet, ComponentLink2URL=https://product.tdk.com/en/system/files?file=dam/doc/product/inductor/inductor/smd/catalog/inductor_commercial_power_vls5045ex_en.pdf, Supplier 1=Digikey, Supplier 2=Mouser, Supplier Part Number 2=810-VLS5045EX-2R2N
FB1: library part "FERRITE 220 Ohms 0603", "FERRITE BEAD 220 OHM 0603 1LN", Manufacturer=Murata, Manufacturer P/N=BLM18PG221SN1D, Supplier Part Number 1=490-5221-1-ND, Supplier 1=Digikey, Supplier 2=Mouser, Supplier Part Number 2=81-BLM18PG221SN1D
J9 J12: Manufacturer="SparkFun Electronics", Manufacturer P/N=PRT-14417, Supplier Part Number 1=PRT-14417-ND, Supplier 1=Digikey, Supplier 2=Mouser, Supplier Part Number 2=474-PRT-14417
J14: library part "CONN HEADER SMD 10POS 1.27MM", "CONN HEADER SMD 10POS 1.27MM", Manufacturer=Samtec, Supplier Part Number 1=SAM9440-ND, Manufacturer P/N=FTSH-105-01-L-DV-K-A-P, Supplier 1=Digikey, Supplier 2=Mouser, Supplier Part Number 2=200-FTSH1051LDVKAPTR
J15: library part "CONN HEADER VERT 12POS 2MM", "CONN HEADER VERT 12POS 2MM", Manufacturer=Amphenol, Supplier Part Number 1=609-3106-ND, Manufacturer P/N=98414-G06-12ULF, Supplier 1=Digikey, Supplier 2=Mouser, Supplier Part Number 2=649-98414-G06-12ULF
L1 L2: library part "FIXED IND 6.8UH 18.5A 4.1MOHM SM", "FIXED IND 6.8UH 18.5A 4.1MOHM SM", Manufacturer="Wurth Elektronik", Manufacturer P/N=7443556680, Supplier Part Number 1=732-2174-1-ND, Supplier 1=Digikey, Supplier 2=Mouser, Supplier Part Number 2=710-7443556680
Q1 Q2 Q3 Q4 Q5 Q6: library part "MOSFET P-CH 30V 12.6A 8SOIC", "MOSFET P-CH 30V 12.6A 8SOIC", Manufacturer Name=Nexperia, Supplier Part Number 1=SI4435FDY-T1-GE3CT-ND, Supplier 1=Digikey, Supplier 2=Mouser, Supplier Part Number 2=78-SI4435FDY-T1-GE3
Q7 Q8: library part "TRANSISTOR, PNP, -40V, -0.2A, 10", "TRANSISTOR, PNP, -40V, -0.2A, 10", Manufacturer="Taiwan Semiconductor", Manufacturer P/N="MMBT3906 RFG", Supplier Part Number 1=MMBT3906RFGCT-ND, Supplier 1=Digikey, Supplier 2=Mouser, Supplier Part Number 2=821-MMBT3906RFG
R1 R2 R5 R6 R7 R9 R10 R11 R17 R19 R25 R26 R27 R31 R33 R41 R42 R47 R48 R49: "Résistance 0603 100mW 1% 10K", Manufacturer=Yageo, Manufacturer P/N=RC0603FR-0710KL, Power=100mW, Supplier Part Number 1=311-10.0KHRCT-ND, Tolerance=1%, Voltage=75V, ComponentLink1Description=Datasheet, ComponentLink1URL=https://www.yageo.com/upload/media/product/productsearch/datasheet/rchip/PYu-RC_Group_51_RoHS_L_11.pdf, ComponentLink2Description=Supplier, ComponentLink2URL=https://www.digikey.ch/product-detail/fr/yageo/RC0603FR-0710KL/311-10-0KHRCT-ND/729827, Supplier 1=Digikey, Supplier 2=Mouser, Supplier Part Number 2=603-RC0603FR-0710KL
R3 R12 R36 R37 R43: "RES SMD DNP JUMPER 1/10W 0603", ComponentLink1Description=Datasheet, ComponentLink2Description=Supplier
R4 R15 R16 R60: "RES SMD 4.7K OHM 1% 1/10W 0603", Manufacturer=Yageo, Manufacturer P/N=RC0603FR-074K7L, Power=100mW, Supplier Part Number 1=311-4.70KHRCT-ND, Tolerance=1%, Voltage=75V, ComponentLink1Description=Datasheet, ComponentLink1URL=https://www.yageo.com/upload/media/product/productsearch/datasheet/rchip/PYu-RC_Group_51_RoHS_L_11.pdf, ComponentLink2Description=Supplier, ComponentLink2URL=https://www.digikey.ch/product-detail/fr/yageo/RC0603FR-074K7L/311-4-70KHRCT-ND/730159, Supplier 1=Digikey, Supplier 2=Mouser, Supplier Part Number 2=603-RC0603FR-074K7L
R8 R28 R50: library part "RES 0.003 OHM 5% 1W 1210", "RES 0.003 OHM 5% 1W 1210", Manufacturer=Rohm, Manufacturer P/N=PMR25HZPJV3L0, Power=1W, Supplier Part Number 1=RHM.003AQCT-ND, Tolerance=5%, Voltage=75V, Supplier 1=Digikey, Supplier 2=Mouser, Supplier Part Number 2=755-PMR25HZPJV3L0
R13: library part "RES SMD 31.6K OHM 1% 1/10W 0603", "RES SMD 31.6K OHM 1% 1/10W 0603", Manufacturer=Yageo, Manufacturer P/N=RC0603FR-0731K6L, Power=100mW, Supplier Part Number 1=311-31.6KHRCT-ND, Tolerance=1%, Voltage=75V, ComponentLink1Description=Datasheet, ComponentLink1URL=https://www.mouser.ch/datasheet/2/447/Yageo_03_18_2021_PYu_RC_Group_51_RoHS_L_11-2199992.pdf, ComponentLink2Description=Supplier, ComponentLink2URL=https://www.digikey.ch/product-detail/fr/yageo/RC0603FR-0731K6L/311-31-6KHRCT-ND/730098, Supplier 1=Digikey, Supplier 2=Mouser, Supplier Part Number 2=603-RC0603FR-0731K6L
R14: library part "RES SMD 10K OHM 1% 1/10W 0603", "Résistance 0603 100mW 1% 10K", Manufacturer=Yageo, Manufacturer P/N=RC0603FR-0710KL, Power=100mW, Supplier Part Number 1=311-10.0KHRCT-ND, Tolerance=1%, Voltage=75V, ComponentLink1Description=Datasheet, ComponentLink1URL=https://www.yageo.com/upload/media/product/productsearch/datasheet/rchip/PYu-RC_Group_51_RoHS_L_11.pdf, ComponentLink2Description=Supplier, ComponentLink2URL=https://www.digikey.ch/product-detail/fr/yageo/RC0603FR-0710KL/311-10-0KHRCT-ND/729827, Supplier 1=Digikey, Supplier 2=Mouser, Supplier Part Number 2=603-RC0603FR-0710KL
R18 R56 R57: "RES SMD 22 OHM 1% 1/10W 0603", Manufacturer=Yageo, Manufacturer P/N=RC0603FR-0722RL, Power=100mW, Supplier Part Number 1=311-22.0HRCT-ND, Tolerance=1%, Voltage=75V, ComponentLink1Description=Datasheet, ComponentLink1URL=https://www.yageo.com/upload/media/product/productsearch/datasheet/rchip/PYu-RC_Group_51_RoHS_L_11.pdf, ComponentLink2Description=Supplier, ComponentLink2URL=https://www.digikey.ch/product-detail/fr/yageo/RC0603FR-0710KL/311-10-0KHRCT-ND/729827, Supplier 1=Digikey, Supplier 2=Mouser, Supplier Part Number 2=603-RC0603FR-0722RL
R20 R23 R24: "RES SMD 1K OHM 1% 1/10W 0603", Manufacturer=Yageo, Manufacturer P/N=RC0603FR-071KL, Power=100mW, Supplier Part Number 1=311-1.00KHRCT-ND, Tolerance=1%, Voltage=75V, ComponentLink1Description=Datasheet, ComponentLink1URL=https://www.yageo.com/upload/media/product/productsearch/datasheet/rchip/PYu-RC_Group_51_RoHS_L_11.pdf, ComponentLink2Description=Supplier, ComponentLink2URL=https://www.digikey.ch/product-detail/fr/yageo/RC0603FR-071KL/311-1-00KHRCT-ND/729790, Supplier 1=Digikey, Supplier 2=Mouser, Supplier Part Number 2=603-RC0603FR-071KL
R21 R22: "METAL CURRENT SENSOR 2512 1% 100", Manufacturer=Yageo, Manufacturer P/N=PA2512FKF7W0R006E, Power=2W, Supplier Part Number 1=YAG6098CT-ND, Tolerance=1%, Voltage=75V, Supplier 1=Digikey, Supplier 2=Mouser, Supplier Part Number 2=603-PA2512FKF7WR006E
R29 R38 R39 R40 R45 R51: "RES SMD 0 OHM JUMPER 1/10W 0603", Manufacturer=Yageo, Manufacturer P/N=RC0603FR-070RL, Power=100mW, Supplier Part Number 1=311-0.0HRCT-ND, Tolerance=1%, Voltage=75V, ComponentLink1Description=Datasheet, ComponentLink1URL=https://www.yageo.com/upload/media/product/productsearch/datasheet/rchip/PYu-RC_Group_51_RoHS_L_11.pdf, ComponentLink2Description=Supplier, ComponentLink2URL=https://www.digikey.ch/product-detail/fr/yageo/RC0603FR-070RL/311-0-0HRCT-ND/4340584, Supplier 1=Digikey, Supplier 2=Mouser, Supplier Part Number 2=603-RC0603FR-070RL
R30: "RES 2 OHM 1% 1/10W 0603", Manufacturer=Yageo, Manufacturer P/N=RC0603FR-072RL, Power=100mW, Supplier Part Number 1=311-2.00HRCT-ND, Tolerance=1%, Voltage=75V, Supplier 1=Digikey, Supplier 2=Mouser, Supplier Part Number 2=603-RC0603FR-072RL
R32 R34 R53 R54: library part "RES 100 OHM 1% 1/10W 0603", "RES 100 OHM 1% 1/10W 0603", Manufacturer=Yageo, Manufacturer P/N=RC0603FR-07100RL, Power=100mW, Supplier Part Number 1=311-100HRCT-ND, Tolerance=1%, Voltage=75V, Supplier 1=Digikey, Supplier 2=Mouser, Supplier Part Number 2=603-RC0603FR-07100RL
R35: "RES 23.2K OHM 1% 1/10W 0603", Manufacturer=Yageo, Manufacturer P/N=RC0603FR-0723K2L, Power=100mW, Supplier Part Number 1=311-23.2KHRCT-ND, Tolerance=1%, Voltage=75V, Supplier 1=Digikey, Supplier 2=Mouser, Supplier Part Number 2=03-RC0603FR-0723K2L
R44 R52: "RES 20K OHM 1% 1/10W 0603", Manufacturer=Yageo, Manufacturer P/N=RC0603FR-0720KL, Power=100mW, Supplier Part Number 1=311-20.0KHRCT-ND, Tolerance=1%, Voltage=75V, Supplier 1=Digikey, Supplier 2=Mouser, Supplier Part Number 2=603-RC0603FR-0720KL
R46: "RES 15K OHM 1% 1/10W 0603", Manufacturer=Yageo, Manufacturer P/N=RC0603FR-1315KL, Power=100mW, Supplier Part Number 1=13-RC0603FR-1315KLCT-ND, Tolerance=1%, Voltage=75V, Supplier 1=Digikey, Supplier 2=Mouser, Supplier Part Number 2=603-RC0603FR-1315KL
R55: "RES 17.8K OHM 1% 1/10W 0603", Manufacturer=Yageo, Manufacturer P/N=RC0603FR-0717K8L, Power=100mW, Supplier Part Number 1=311-17.8KHRCT-ND, Tolerance=1%, Voltage=75V, Supplier 1=Digikey, Supplier 2=Mouser, Supplier Part Number 2=603-RC0603FR-0717K8L
R58 R59: "RES 100 OHM 1% 1/10W 0603", Manufacturer=Yageo, Manufacturer P/N=RC0603FR-07100RL, Power=100mW, Supplier Part Number 1=311-100HRCT-ND, Tolerance=1%, Voltage=75V, Supplier 1=Digikey, Supplier 2=Mouser, Supplier Part Number 2=603-RC0603FR-07100RL
SW1 SW2 SW3: "Tactile Switch SPST-NO Top Actuated SMD", Manufacturer="Omron Electronics", Manufacturer P/N=B3U-1000P, Supplier Part Number 1=SW1020CT-ND, Voltage=12V, Component=SWITCH, Component Type Category Connector Type="SWITCH SPST-NO", ComponentLink1Description=Datasheet, ComponentLink1URL=http://www.omron.com/ecb/products/pdf/en-b3u.pdf, ComponentLink2Description=Supplier, ComponentLink2URL=http://www.mouser.ch/ProductDetail/Omron-Electronics/B3U-1000P/?qs=sGAEpiMZZMsgGjVA3toVBD%252bqDoRYvPtZBt73XVLWoZs%3d, ID=1814, RoHS Compliant=True, Supplier 1=Digi-Key, Supplier 2=Mouser, Supplier Part Number 2=653-B3U-1000P
T1 T2 T3: library part "MOSFET N-CH 60V 1.8A 6TSOP", "MOSFET N-CH 60V 1.8A 6TSOP", Manufacturer Name=Nexperia, Supplier Part Number 1=1727-8649-1-ND, Supplier 1=Digikey, Supplier 2=Mouser, Supplier Part Number 2=771-PMN230ENEAX
T4 T5 T6 T7: library part "MOSFET N-CH 80V 40A TSDSON", "MOSFET N-CH 80V 40A TSDSON", Manufacturer Name=Infineon, Supplier Part Number 1=BSZ110N08NS5ATMA1CT-ND, Manufacturer P/N=BSZ110N08NS5ATMA1, Supplier 1=Digikey, Supplier 2=Mouser, Supplier Part Number 2=726-BSZ110N08NS5ATMA
U1: library part "IC CURRENT SENSE MON SGL 10VDFN", "IC CURRENT SENSE MON SGL 10VDFN", Manufacturer=Microchip, Manufacturer P/N=PAC1710-1-AIA-TR, Supplier Part Number 1=PAC1710-1-AIA-CT-ND, Supplier 1=Digikey, Supplier 2=Mouser, Supplier Part Number 2=579-PAC1710-1-AIA-TR
U2: library part "IC REG CTRLR BUCK PMBUS 52QFN", "IC REG CTRLR BUCK PMBUS 52QFN", Manufacturer="Analog Devices", Manufacturer P/N=LTC3886EUKG#PBF, Supplier Part Number 1=LTC3886EUKG#PBF-ND, Supplier 1=Digikey, Supplier 2=Mouser, Supplier Part Number 2=584-LTC3886EUKG#PBF
U3: library part AP62250Z6-7, "DCDC CONV BUCK 3A SOT563", Manufacturer="Diodes Incorporated", Supplier Part Number 1=31-AP62250Z6-7CT-ND, ComponentLink1Description=Supplier, ComponentLink1URL=https://www.digikey.ch/product-detail/fr/diodes-incorporated/AP62250Z6-7/31-AP62250Z6-7CT-ND/12349406, ComponentLink2Description=Datasheet, ComponentLink2URL=https://www.diodes.com/assets/Datasheets/AP62250.pdf, Manufacturer P/N=AP62250Z6-7, Supplier 1=Digikey, Supplier 2=Mouser, Supplier Part Number 2=621-AP62250Z6-7
U4: library part "IC MCU 32BIT 16KB FLASH 32QFN", "IC MCU 32BIT 16KB FLASH 32QFN", Manufacturer=Microchip, Manufacturer P/N=ATSAMD20E14A-MUT, Supplier Part Number 1=ATSAMD20E14A-MUTCT-ND, Supplier 1=Digikey, Supplier 2=Mouser, Supplier Part Number 2=556-ATSAMD20E14A-MUT
U5: library part SN74LVC2GU04DBVR, "IC INVERTER 2CH 2-INP SOT23-6", Manufacturer="Texas Instruments", Supplier Part Number 1=296-13276-1-ND, Manufacturer P/N=SN74LVC2GU04DBVR, Supplier 1=Digikey, Supplier 2=Mouser, Supplier Part Number 2=595-SN74LVC2GU04DBVR
Y1: library part "CRYSTAL 32.7680KHZ 12.5PF SMD", "CRYSTAL 32.7680KHZ 12.5PF SMD", Manufacturer="Abracon LLC", Manufacturer P/N=ABS06-32.768KHZ-T, Supplier Part Number 1=535-10104-1-ND, Supplier 1=Digikey, Supplier 2=Mouser, Supplier Part Number 2=815-ABS06-32.768K-T
Y2: library part "CRYSTAL 12.0000MHZ 10PF SMD", "CRYSTAL 12.0000MHZ 10PF SMD", Manufacturer="Abracon LLC", Manufacturer P/N=ABM10AIG-12.000MHZ-4Z-T3, Supplier Part Number 1=535-13360-1-ND, Supplier 1=Digikey, Supplier 2=Mouser, Supplier Part Number 2=815-M10AIG-12-4ZT3

## Via types
v1: diameter 0.6, hole 0.33, Top Layer to Bottom Layer, 4 vias
v2: diameter 0.6, hole 0.3, Top Layer to Bottom Layer, 4 vias
v3: diameter 0.55, hole 0.25, Top Layer to Bottom Layer, 2 vias

## Nets (pads, with @x,y where several pads share a name; then routed paths per layer and width w, separated by ;. In a path a pad name is that pad's centre, name@x,y a point inside that pad or via, vN(x,y) a via of type N, cw(c..) or ccw(c..) an arc to the next point about the centre after c; other vN are vias at no path point)
+2V5_LTC: C34.1 R31.2 R36.2 R37.2 R43.2 R44.1 R52.1 U2.27
+3V3_ANA_UC: C12.1 C13.1 FB1.2 U4.9
+3V3_LTC: C35.1 R25.1 R26.1 R33.2 R41.1 R42.1 R47.1 R48.1 U2.30
+3V3_UC: C3.1 C4.1 C10.1 C11.1 C50.1 D2.2 D3.2 F1.2 FB1.1 J14.1 J15.5 R3.1 R4.1 R5.2 R11.1 R13.1 R15.1 R16.1 R17.2 R19.2 R20.1 R60.1 U1.10 U4.30 U5.5
+5V: C40.1 C41.1 C42.1 C43.1 C44.1 C45.1 J1.1 J15.1 Q3.5 Q3.6 Q3.7 Q3.8 R6.1 R50.2 R51.2 R54.2
+5V_P: J4.1 J5.1 Q4.5 Q4.6 Q4.7 Q4.8
+12V: C21.1 C22.1 C23.1 C24.1 C25.1 C26.1 C28.1 J7.1 J8.1 J10.1 R28.2 R29.2 R34.2 U2.43
+INTVCC_LTC: C29.1 D1.1 D4.1 U2.44
+VBAT: J2.7 J2.8 J2.9 J2.10 Q1.5 Q1.6 Q1.7 Q1.8 R1.1
+VP: C2.1 C51.1 C52.1 J6.1 Q2.5 Q2.6 Q2.7 Q2.8 Q5.5 Q5.6 Q5.7 Q5.8 R2.1 R9.1 R21.1 R22.1 R23.1 R30.1 U3.1
\ALERT_VBAT: R11.2 U1.7 U4.20
\UC_RESET: J14.10 R17.1 SW1.1 U4.26
ALERTB: J15.6 R33.1 U2.16 | length 5.1
  Bottom Layer w0.15: U2.16 42.325,27.075 42.8,27.55 42.8,29.075 43.794,30.069 R33.1
GND: C2.2 C3.2 C4.2 C5.2 C6.2 C7.2 C8.2 C9.2 C10.2 C11.2 C12.2 C13.2 C14.2 C15.2 C16.2 C19.2 C20.2 C21.2 C22.2 C23.2 C24.2 C25.2 C26.2 C27.2 C28.2 C29.2 C31.2 C32.2 C33.2 C34.2 C35.2 C36.2 C37.2 C38.2 C40.2 C41.2 C42.2 C43.2 C44.2 C45.2 C47.2 C48.2 C49.2 C50.2 C51.2 C52.2 J1.2 J2.1 J2.2 J2.3 J2.4 J4.2 J5.2 J6.2 J7.2 J8.2 J9.1 J10.2 J11.2 J12.1 J13.2 J14.3 J14.5 J15.3 J15.10 Q7.1 Q7.3 Q8.1 Q8.3 R7.1 R10.1 R12.2 R14.2 R18.2 R27.2 R35.2 R38.2 R39.1 R40.1 R45.1 R46.2 R49.2 R55.2 R56.2 R57.2 T1.4 T2.4 T3.4 T5.1 T5.2 T5.3 T5.10 T7.1 T7.2 T7.3 T7.10 U1.5 U1.11 U2.8 U2.53 U3.3 U4.10 U4.28 U5.2 | length 3.1
  Top Layer w0.5: J9.1 86.92,53.035 v3(86.92,51.517) ; J12.1 94.375,51.531 v3(94.381,51.525)
  other v2: 51.225,35.9 52.225,35.9 51.225,36.9 52.225,36.9
LED0: U4.21 U5.1
LED1: U4.22 U5.3
NetC1_1: C1.1 U3.4 | length 1.5
  Bottom Layer w0.15: C1.1 23.325,46.511 U3.4
NetC1_2: C1.2 F1.1 U3.2 | length 3.5
  Bottom Layer w0.3: C1.2 26.975,46.45 F1.1
NetC5_1: C5.1 U4.29
NetC6_1: C6.1 U4.1 Y1.1 | length 4.2
  Bottom Layer w0.15: C6.1 Y1.1 61.425,18.05 61.666,17.809 U4.1
NetC7_1: C7.1 U4.2 Y1.2 | length 5.9
  Bottom Layer w0.15: C7.1 Y1.2 61.525,19.5 62.166,18.859 U4.2
NetC8_1: C8.1 U4.15 Y2.1 | length 7.9
  Bottom Layer w0.15: U4.15 67.844,12.631 69.5,10.975 69.5,9.975 69.925,9.55 69.925,9.5 70.275,9.15 Y2.1 C8.1
NetC9_1: C9.1 U4.16 Y2.3 | length 4.1
  Bottom Layer w0.15: U4.16 66.719,12.131 67.35,11.5 C9.1 Y2.3
NetC14_1: C14.1 C15.1 C16.1 C36.1 C37.1 C38.1 R21.2 R22.2 R24.1 T4.5 T4.6 T4.7 T4.8 T4.9 T6.5 T6.6 T6.7 T6.8 T6.9
NetC17_1: C17.1 C19.1 R23.2 U2.47 | length 2.7
  Top Layer w0.15: C19.1 23.161,42.15 R23.2 24.389,40.747 C17.1
NetC17_2: C17.2 C20.1 R24.2 U2.46 | length 3
  Top Layer w0.15: C20.1@23.136,37.675 23.186,37.625 R24.2 24.4,37.636 C17.2
NetC18_1: C18.1 D1.2 U2.52
NetC18_2: C18.2 T4.4 U2.2
NetC27_1: C27.1 R30.2 U2.48 | length 5.9
  Bottom Layer w0.15: R30.2 29.817,27.944 C27.1 31.375,26.5 32.3,25.575 U2.48
NetC30_1: C30.1 R32.1 U2.4 | length 1.5
  Top Layer w0.15: C30.1 70.95,32.389 R32.1
NetC30_2: C30.2 R34.1 U2.5 | length 1.5
  Top Layer w0.15: C30.2 71,33.811 R34.1
NetC31_1: C31.1 Q7.2 U2.6 | length 3.9
  Bottom Layer w0.15: Q7.2 C31.1 36.925,29.85 37.028,29.747 U2.6
NetC32_1: C32.1 U2.12 | length 2.4
  Bottom Layer w0.15: C32.1 39.863,29.737 40.028,29.572 U2.12
NetC33_1: C33.1 U2.11 | length 2.8
  Bottom Layer w0.15: C33.1 38.6,29.975 39.528,29.047 U2.11
NetC39_1: C39.1 D4.2 U2.40
NetC39_2: C39.2 T6.4 U2.38
NetC46_1: C46.1 R53.1 U2.9 | length 1.7
  Top Layer w0.15: R53.1 40.036,17.5 C46.1
NetC46_2: C46.2 R54.1 U2.10 | length 1.6
  Top Layer w0.15: R54.1 38.9,15.864 C46.2
NetC47_1: C47.1 Q8.2 U2.36 | length 5.9
  Bottom Layer w0.15: Q8.2 34.4,17.861 C47.1 34.295,18.184 34.295,18.695 36.501,20.901 36.501,21.397 U2.36
NetC48_1: C48.1 U2.31 | length 3.2
  Bottom Layer w0.15: U2.31 39.028,19.547 39.5,19.075 C48.1
NetC49_1: C49.1 U2.32 | length 3.1
  Bottom Layer w0.15: C49.1 38.267,19.217 38.528,19.478 U2.32
NetD2_1: D2.1 R58.1
NetD3_1: D3.1 R59.1
NetJ9_2: J9.2 J12.2 R3.2 | length 12.8
  Top Layer w0.5: J9.2 85.914,50.102 R3.2 92.45,50.1 93.375,51.025 J12.2
NetJ11_1: J11.1 J13.1 R8.2 U1.2
NetL1_1: L1.1 T4.1 T4.2 T4.3 T4.10 T5.5 T5.6 T5.7 T5.8 T5.9 U2.1
NetL1_2: L1.2 R28.1 R32.2
NetL2_1: L2.1 T6.1 T6.2 T6.3 T6.10 T7.5 T7.6 T7.7 T7.8 T7.9 U2.39
NetL2_2: L2.2 R50.1 R53.2
NetQ1_1: Q1.1 Q1.2 Q1.3 Q2.1 Q2.2 Q2.3
NetQ1_4: Q1.4 Q2.4 R1.2 T1.1 T1.2 T1.5 T1.6
NetQ3_1: Q3.1 Q3.2 Q3.3 Q4.1 Q4.2 Q4.3
NetQ3_4: Q3.4 Q4.4 R6.2 T2.1 T2.2 T2.5 T2.6
NetQ5_1: Q5.1 Q5.2 Q5.3 Q6.1 Q6.2 Q6.3
NetQ5_4: Q5.4 Q6.4 R9.2 T3.1 T3.2 T3.5 T3.6
NetQ6_5: Q6.5 Q6.6 Q6.7 Q6.8 R8.1 U1.1
NetR2_2: R2.2 T1.3
NetR7_2: R7.2 T2.3 U4.8
NetR10_2: R10.2 T3.3 U4.7
NetR12_1: R12.1 U1.6
NetR13_2: R13.2 R14.1 U3.6 | length 2.8
  Bottom Layer w0.15: R13.2@21.875,48.175 R14.1 21.951,49.3 22.283,48.969 22.283,48.963 22.37,48.875 U3.6
NetR18_1: R18.1 SW1.2
NetR25_2: R25.2 U2.17 U4.13 | length 4.4
  Bottom Layer w0.15: U2.17 42.375,26.575 43.15,27.35 43.15,28.05 43.987,28.887 R25.2
NetR26_2: R26.2 U2.34 U4.5 | length 4
  Bottom Layer w0.15: R26.2 35.8,19.025 36.1,19.325 36.6,19.325 37.528,20.253 U2.34
NetR27_1: R27.1 U2.19 U4.3 | length 3.4
  Bottom Layer w0.15: U2.19 42.725,25.575 43.675,26.525 R27.1
NetR29_1: R29.1 U2.7
NetR31_1: R31.1 R35.1 U2.23 | length 13.6
  Bottom Layer w0.15: U2.23 52.025,23.575 52.73,24.28 R35.1 R31.1
NetR36_1: R36.1 R39.2 U2.22 | length 10.7
  Bottom Layer w0.15: U2.22 49.725,24.075 50.14,24.49 R39.2 R36.1
NetR37_1: R37.1 R40.2 U2.21 | length 8
  Bottom Layer w0.15: U2.21 44.4,24.575 44.625,24.35 47.275,24.35 47.55,24.625 R40.2 R37.1
NetR38_1: R38.1 U2.28 | length 3.6
  Bottom Layer w0.15: U2.28 40.528,20.822 41.967,19.383 R38.1
NetR41_2: R41.2 U2.29 | length 3.3
  Bottom Layer w0.15: U2.29 40.028,20.747 40.733,20.042 R41.2
NetR42_2: R42.2 U2.13 | length 2.6
  Bottom Layer w0.15: U2.13 40.528,29.003 41.125,29.6 R42.2
NetR43_1: R43.1 R45.2 U2.26 | length 5.5
  Bottom Layer w0.15: U2.26 44.6,22.075 44.975,21.7 R45.2 R43.1
NetR44_2: R44.2 R46.1 U2.25 | length 8.5
  Bottom Layer w0.15: U2.25 47,22.575 47.565,22.01 R46.1 R44.2
NetR47_2: R47.2 U2.18 U4.14 | length 3.7
  Bottom Layer w0.15: U2.18 42.475,26.075 44.106,27.706 R47.2
NetR48_2: R48.2 U2.33 U4.6 | length 3.4
  Bottom Layer w0.15: R48.2 37.033,19.183 38.028,20.178 U2.33
NetR49_1: R49.1 U2.20 U4.4 | length 3.1
  Bottom Layer w0.15: U2.20 43.1,25.075 43.369,25.344 R49.1
NetR51_1: R51.1 U2.35
NetR52_2: R52.2 R55.1 U2.24 | length 11.4
  Bottom Layer w0.15: U2.24 49.2,23.075 50.155,22.12 R55.1 R52.2
NetR56_1: R56.1 SW2.2
NetR57_1: R57.1 SW3.2
NetR58_2: R58.2 U5.6 | length 1.9
  Bottom Layer w0.15: R58.2 54.251,3.572 54.583,3.904 54.583,3.98 54.6,3.997 U5.6
NetR59_2: R59.2 U5.4 | length 1.9
  Bottom Layer w0.15: U5.4 56.5,4.022 56.542,3.98 56.542,3.904 56.874,3.572 R59.2
NetT5_4: T5.4 U2.50
NetT7_4: T7.4 U2.42
PSU_SCL: J2.5 J15.4 R16.2 U1.9 U2.14 U4.12 | length 3.5
  Bottom Layer w0.15: U4.12 67.994,14.131 68.425,13.7 R16.2
PSU_SDA: J2.6 J15.2 R15.2 U1.8 U2.15 U4.11 | length 3.4
  Bottom Layer w0.15: U4.11 67.931,14.631 68.178,14.878 R15.2
RASP_SCL: J9.3 J12.3 R60.2 U4.18 | length 12.9
  Top Layer w0.15: J9.3 84.914,54.114 85.225,54.425 87.25,54.425 90.3,51.375 91.85,51.375 92.375,51.9 J12.3
  Bottom Layer w0.15: U4.18 64.675,11.372 R60.2
RASP_SDA: J9.4 J12.4 R4.2 U4.17 | length 13.3
  Top Layer w0.15: J9.4 83.914,54.214 84.475,54.775 87.375,54.775 90.467,51.683 91.077,51.683 91.375,51.981 J12.4
  Bottom Layer w0.15: U4.17 65.166,10.834 65.695,10.305 65.695,9.991 R4.2
SWITCH0: R5.1 SW2.1 U4.23
SWITCH1: R19.1 SW3.1 U4.24
UC_SWCLK: J14.4 R20.2 U4.32
UC_SWDIO: J14.2 U4.31
pads on no net: J9.S1 J9.S2 J12.S1 J12.S2 J14.6 J14.7 J14.8 J14.9 J14.11 J14.12 J15.7 J15.8 J15.9 J15.11 J15.12 U1.3 U1.4 U3.5 U4.19 U4.25 U4.27 U4.33 Y2.2 Y2.4
copper on no net:
  other v1: 62.816,13.281 64.016,13.281 62.816,14.481 64.016,14.481

## Polygon pours and split planes (outlines as drawn)
+VBAT on Top Layer "+VBAT_L01_P006" (solid, pour order 6): 4.15,41.475 4.15,31.562 6.937,31.562 9.211,33.836 9.211,40.303 7.972,40.303 6.8,41.475
NetL1_1 on Top Layer "NETL1_1_L01_P004" (solid, pour order 4): 75.57,6.975 73.35,6.975 72.65,6.275 70.87,6.275 70.87,4.625 75.57,4.625
NetL2_1 on Top Layer "NETL2_1_L01_P003" (solid, pour order 3): 46.725,9.275 48.945,9.275 49.645,9.975 51.425,9.975 51.425,11.625 46.725,11.625
NetQ5_1 on Top Layer "NETQ5_1_L01_P002" (solid, pour order 2): 40.75,38.75 42.475,38.75 43.4,39.675 45.75,39.675 45.75,43.175 44.05,43.175 43.05,42.175 40.75,42.175
NetQ3_1 on Top Layer "NETQ3_1_L01_P001" (solid, pour order 1): 16.275,14.475 22.337,14.475 22.337,16.588 21.25,17.675 16.275,17.675
NetQ1_1 on Top Layer "NETQ1_1_L01_P000" (solid, pour order 0): 12.825,35.575 18.8,35.575 18.8,37.875 17.625,39.05 12.825,39.05
GND on Layer 1 "GND_L02_P005" (solid, pour order 5): 0.25,0.25 96.25,0.25 96.25,57.75 0.25,57.75
NetC1_2 on Bottom Layer "NETC1_2_L04_P008" (solid, pour order 8): 24.325,48.226 25.224,48.226 25.832,47.618 25.832,46.165 29.85,46.165 29.85,48.524 24.325,48.524
+VP on Bottom Layer "+VP_L04_P009" (solid, pour order 9): 24.336,48.718 25.22,48.718 25.816,49.314 28.55,49.314 28.55,51.125 25.925,51.125 24.336,49.536
+3V3_UC on Bottom Layer "+3V3_UC_L04_P007" (solid, pour order 7): 25.8,44.475 25.8,38.125 29.875,38.125 29.875,44.475

## Text inside footprints (layer, text, board x,y; h text height)
C21: Top Overlay "+" at 83.098,37.275 h1.14 r180; Mechanical 13 "+" at 83.098,37.275 h1.14 r180
C22: Top Overlay "+" at 84.075,3.275 h1.14; Mechanical 13 "+" at 84.075,3.275 h1.14
C40: Top Overlay "+" at 33.525,21.675 h1.14 r90; Mechanical 13 "+" at 34.55,21.675 h1.14 r90
C41: Top Overlay "+" at 31.525,21.725 h1.14 r90; Mechanical 13 "+" at 29.1,21.702 h1.14 r90
C51: Top Overlay "+" at 21.775,45.575 h1.2 r180
C52: Top Overlay "+" at 32.5,45.6 h1.2 r180
D1: Top Overlay "K" at 68.875,2.5 h1; Mechanical 13 "K" at 68.875,2.5 h1
D2: Top Overlay "K" at 54.362,1.263 h0.4 r90
D3: Top Overlay "K" at 57.138,1.263 h0.4 r90
D4: Top Overlay "K" at 51.8,7.45 h1; Mechanical 13 "K" at 51.95,5.9 h1 r180